# Altium PCB COMM_V2.PcbDoc (part 1 of 2)
Units mm, origin at the board's own origin, x right, y up, seen from the top; angles counter-clockwise.
Board outline 93 x 90 mm, 6 copper layers (Top Layer, Layer 3, Layer 1, Layer 2, Layer 4, Bottom Layer), stack 0.816 mm thick; 305 components, 305 nets, 1414 pads, 23 vias.
Unrouted connection lines stored in the file: 699.
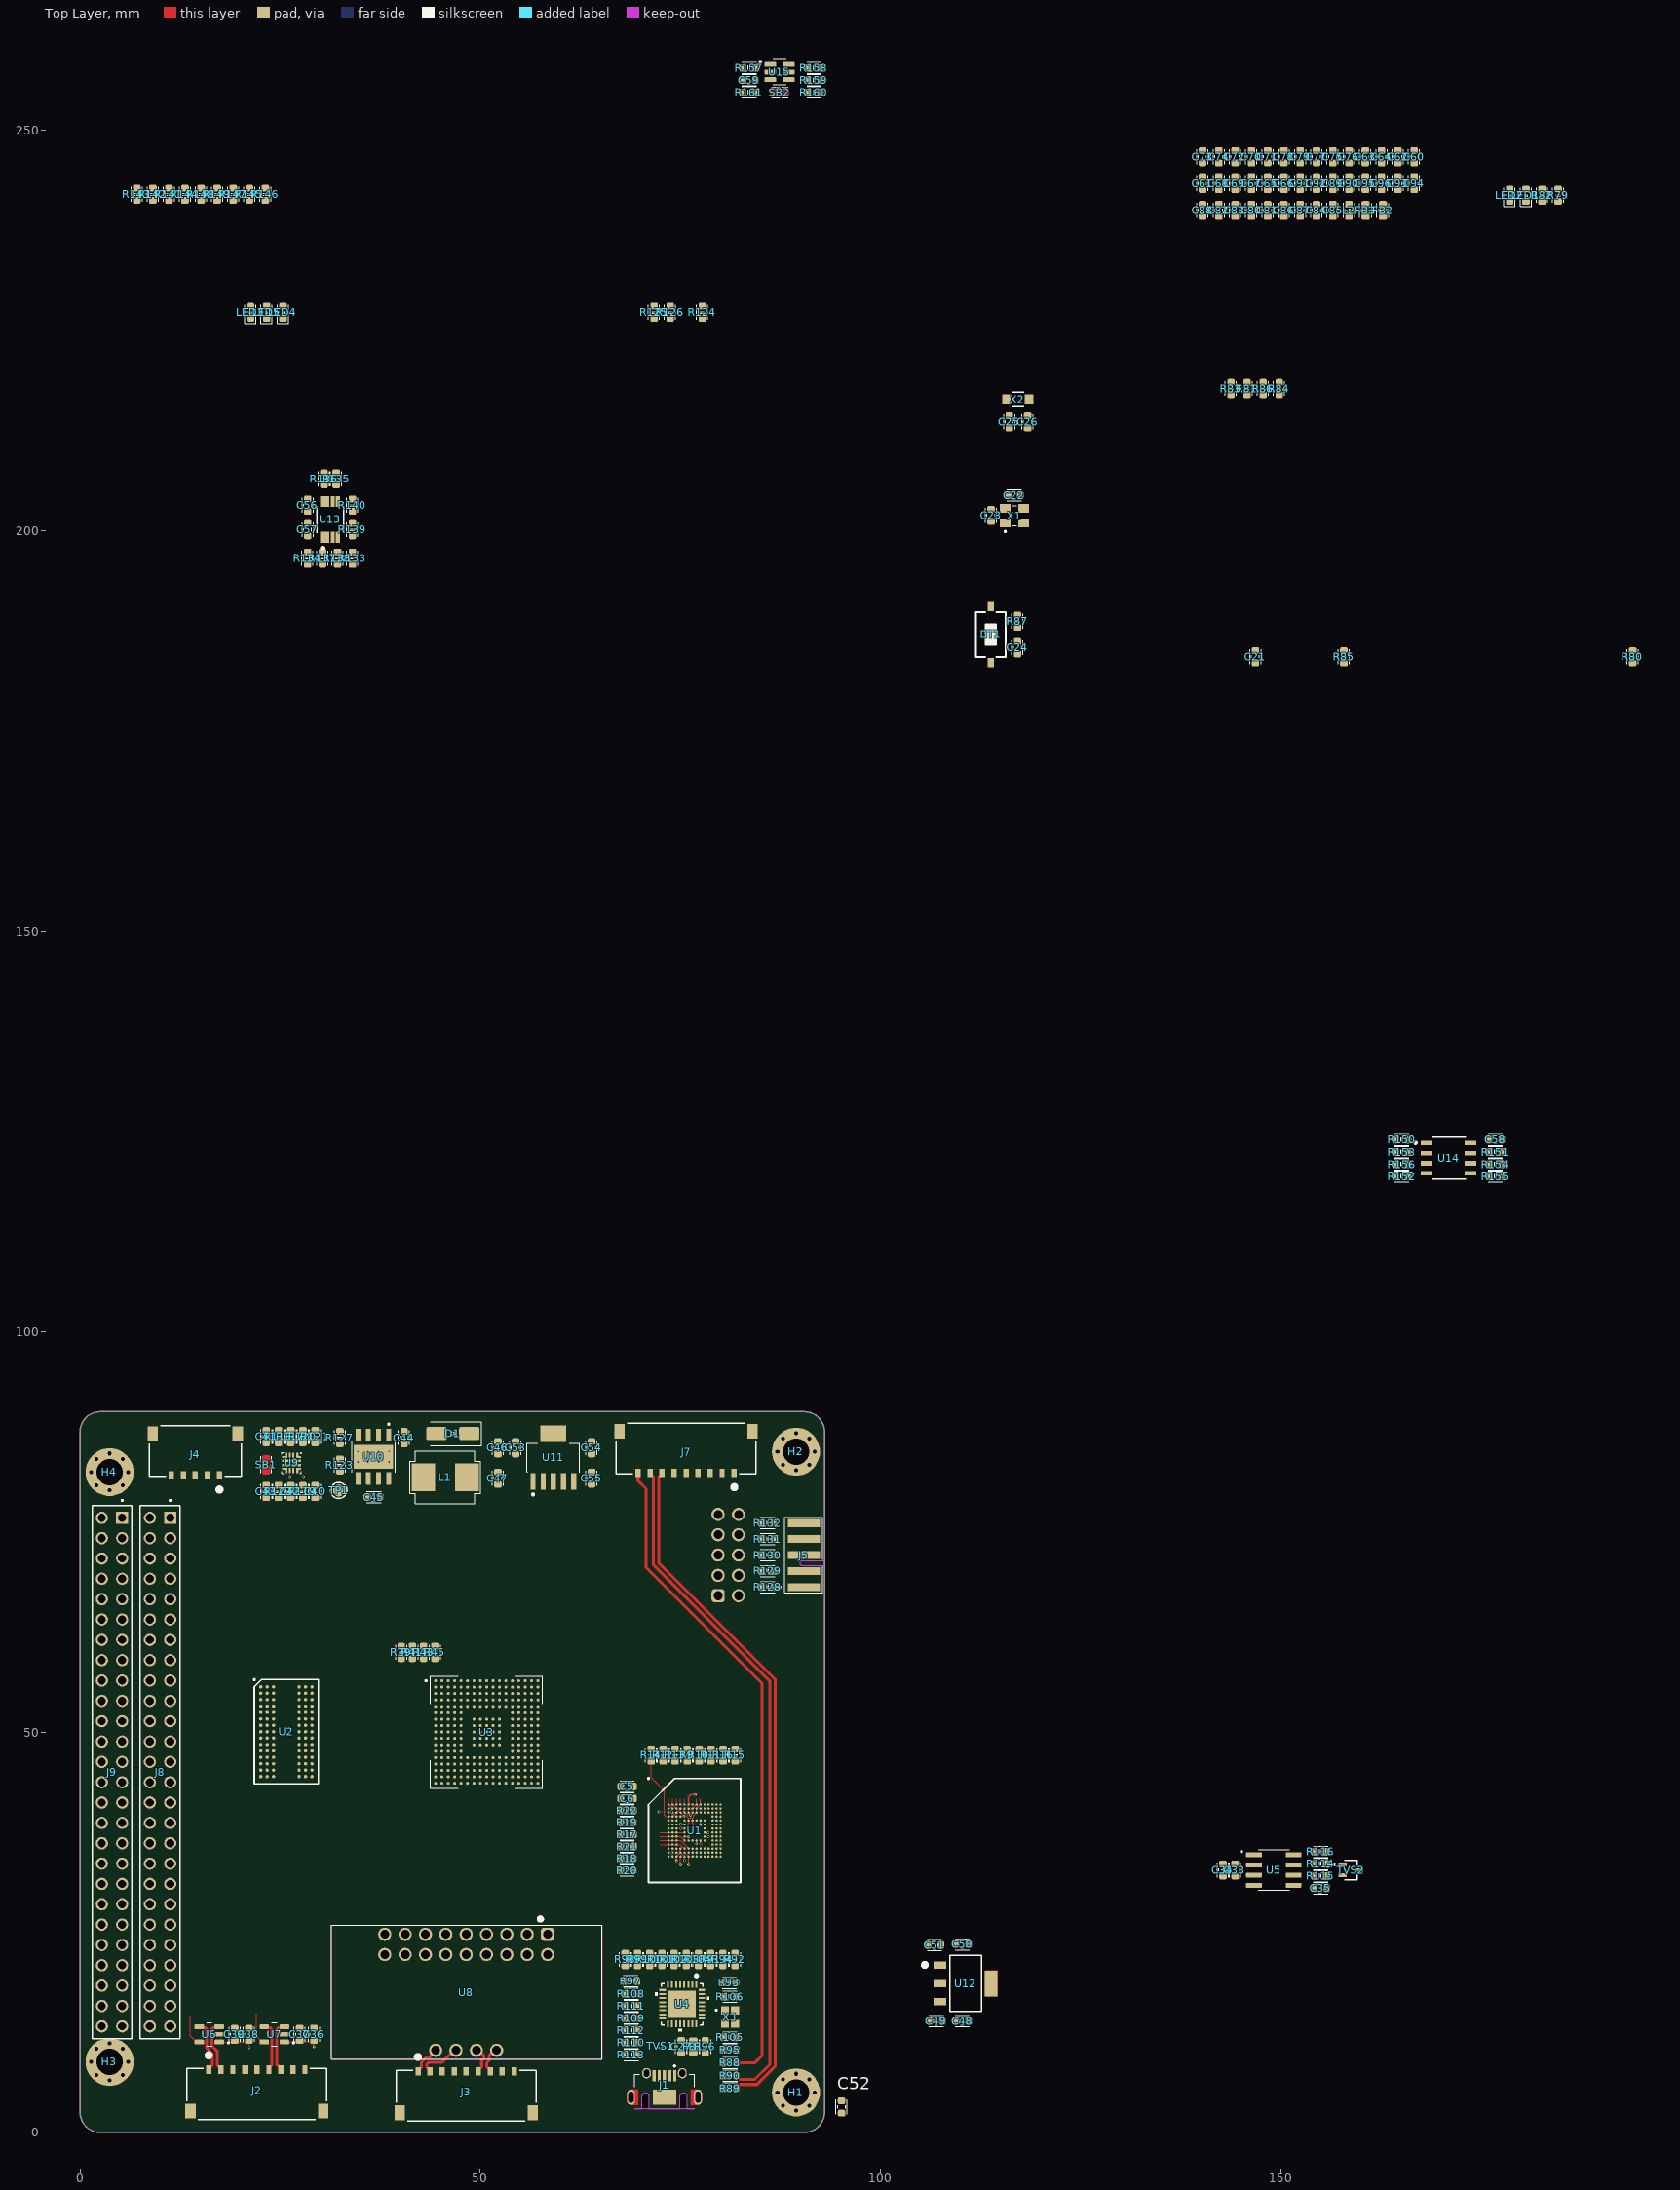
[diagram p0: Top Layer view]
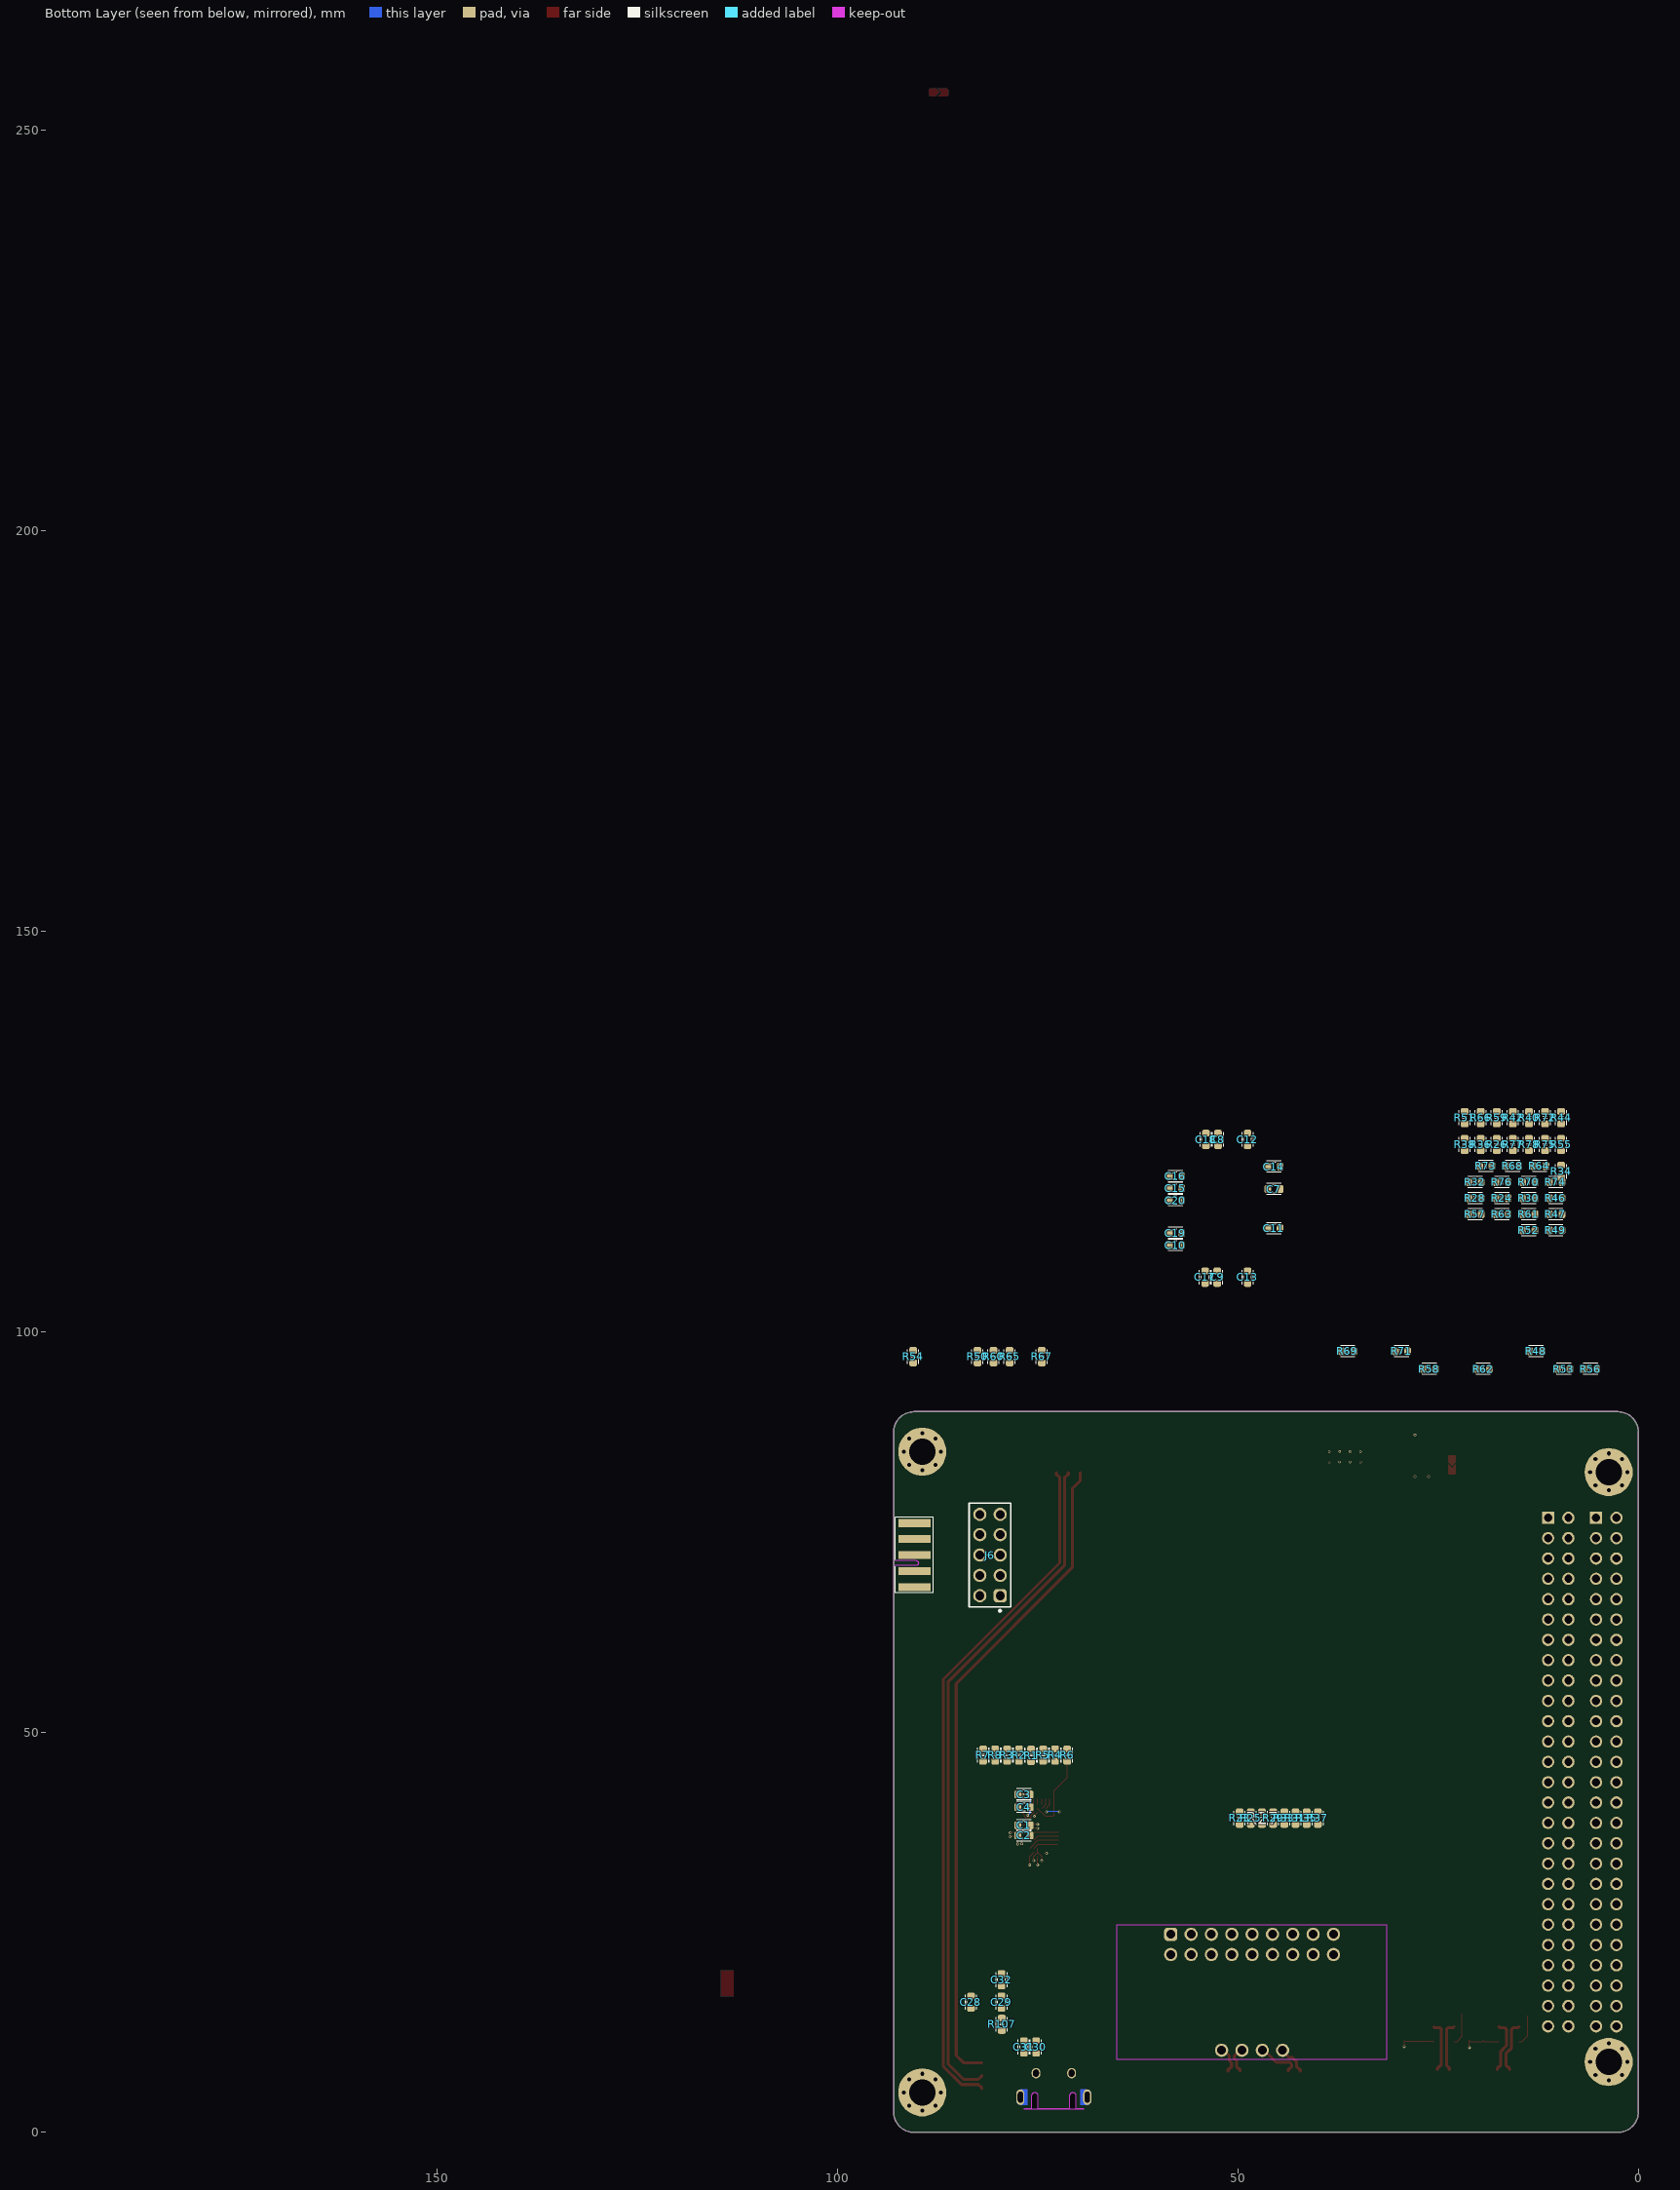
[diagram p1: Bottom Layer view, seen from below]
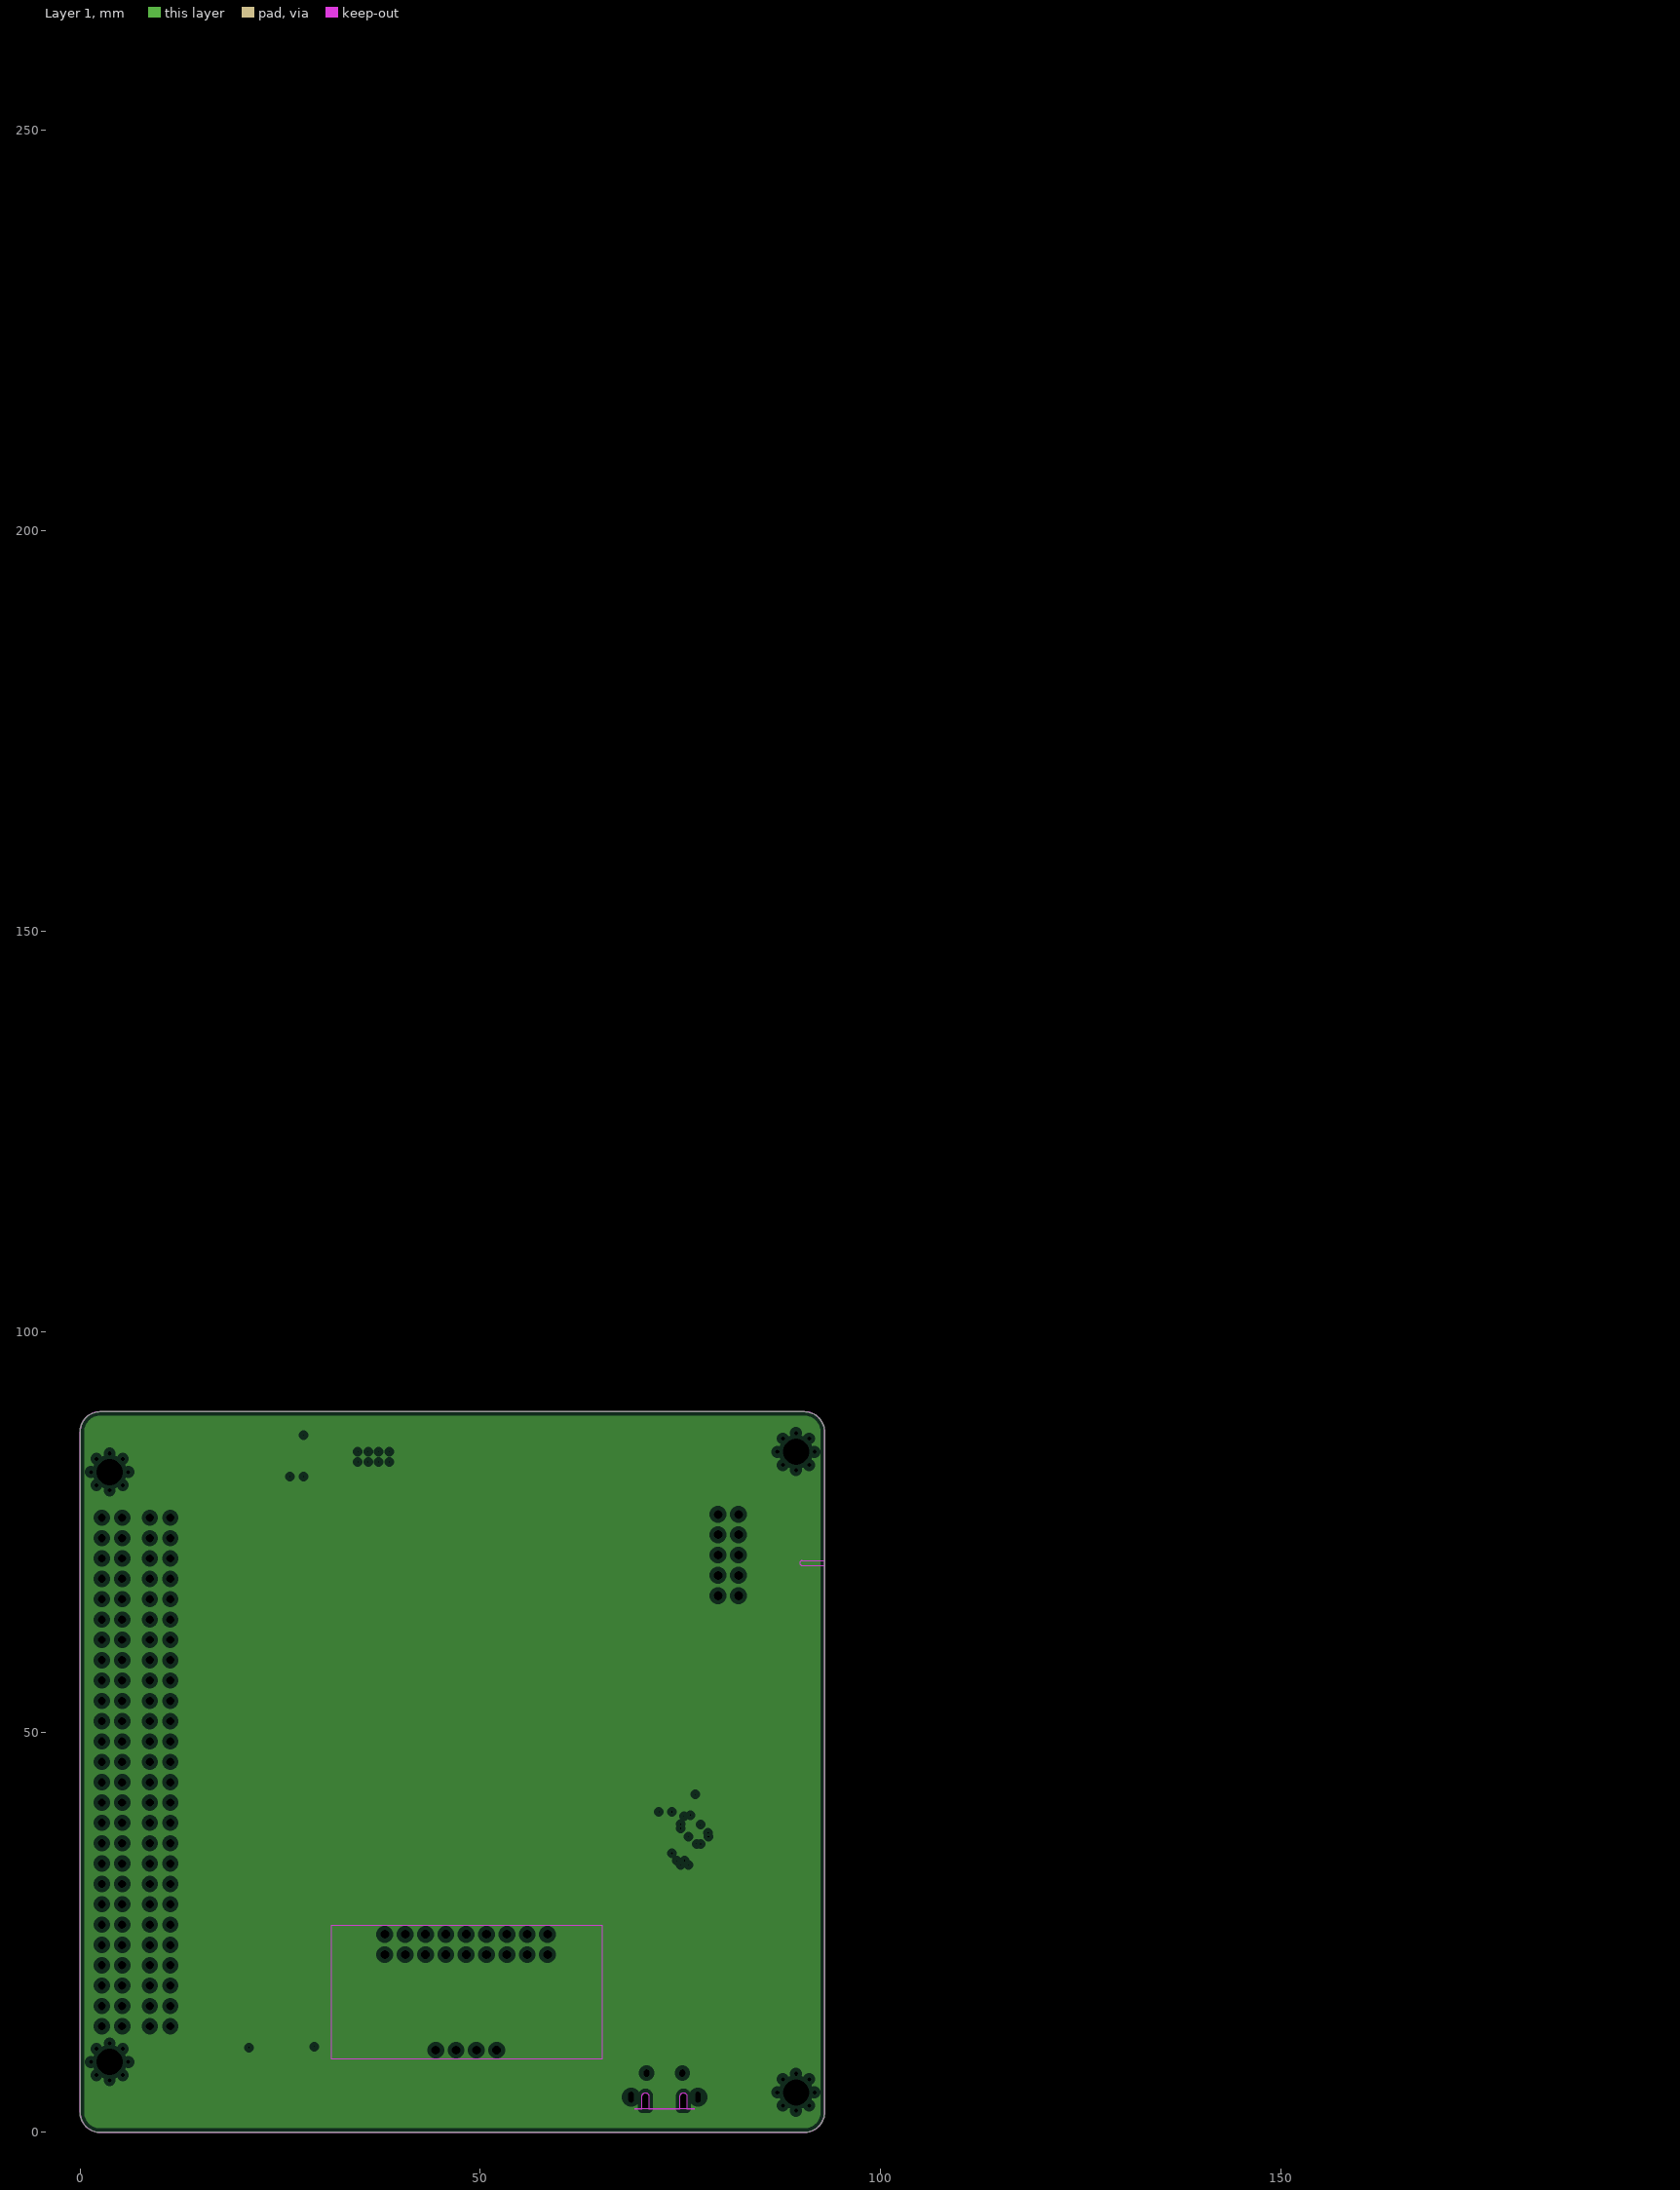
[diagram p2: Layer 1, clearances drawn from the general rule]
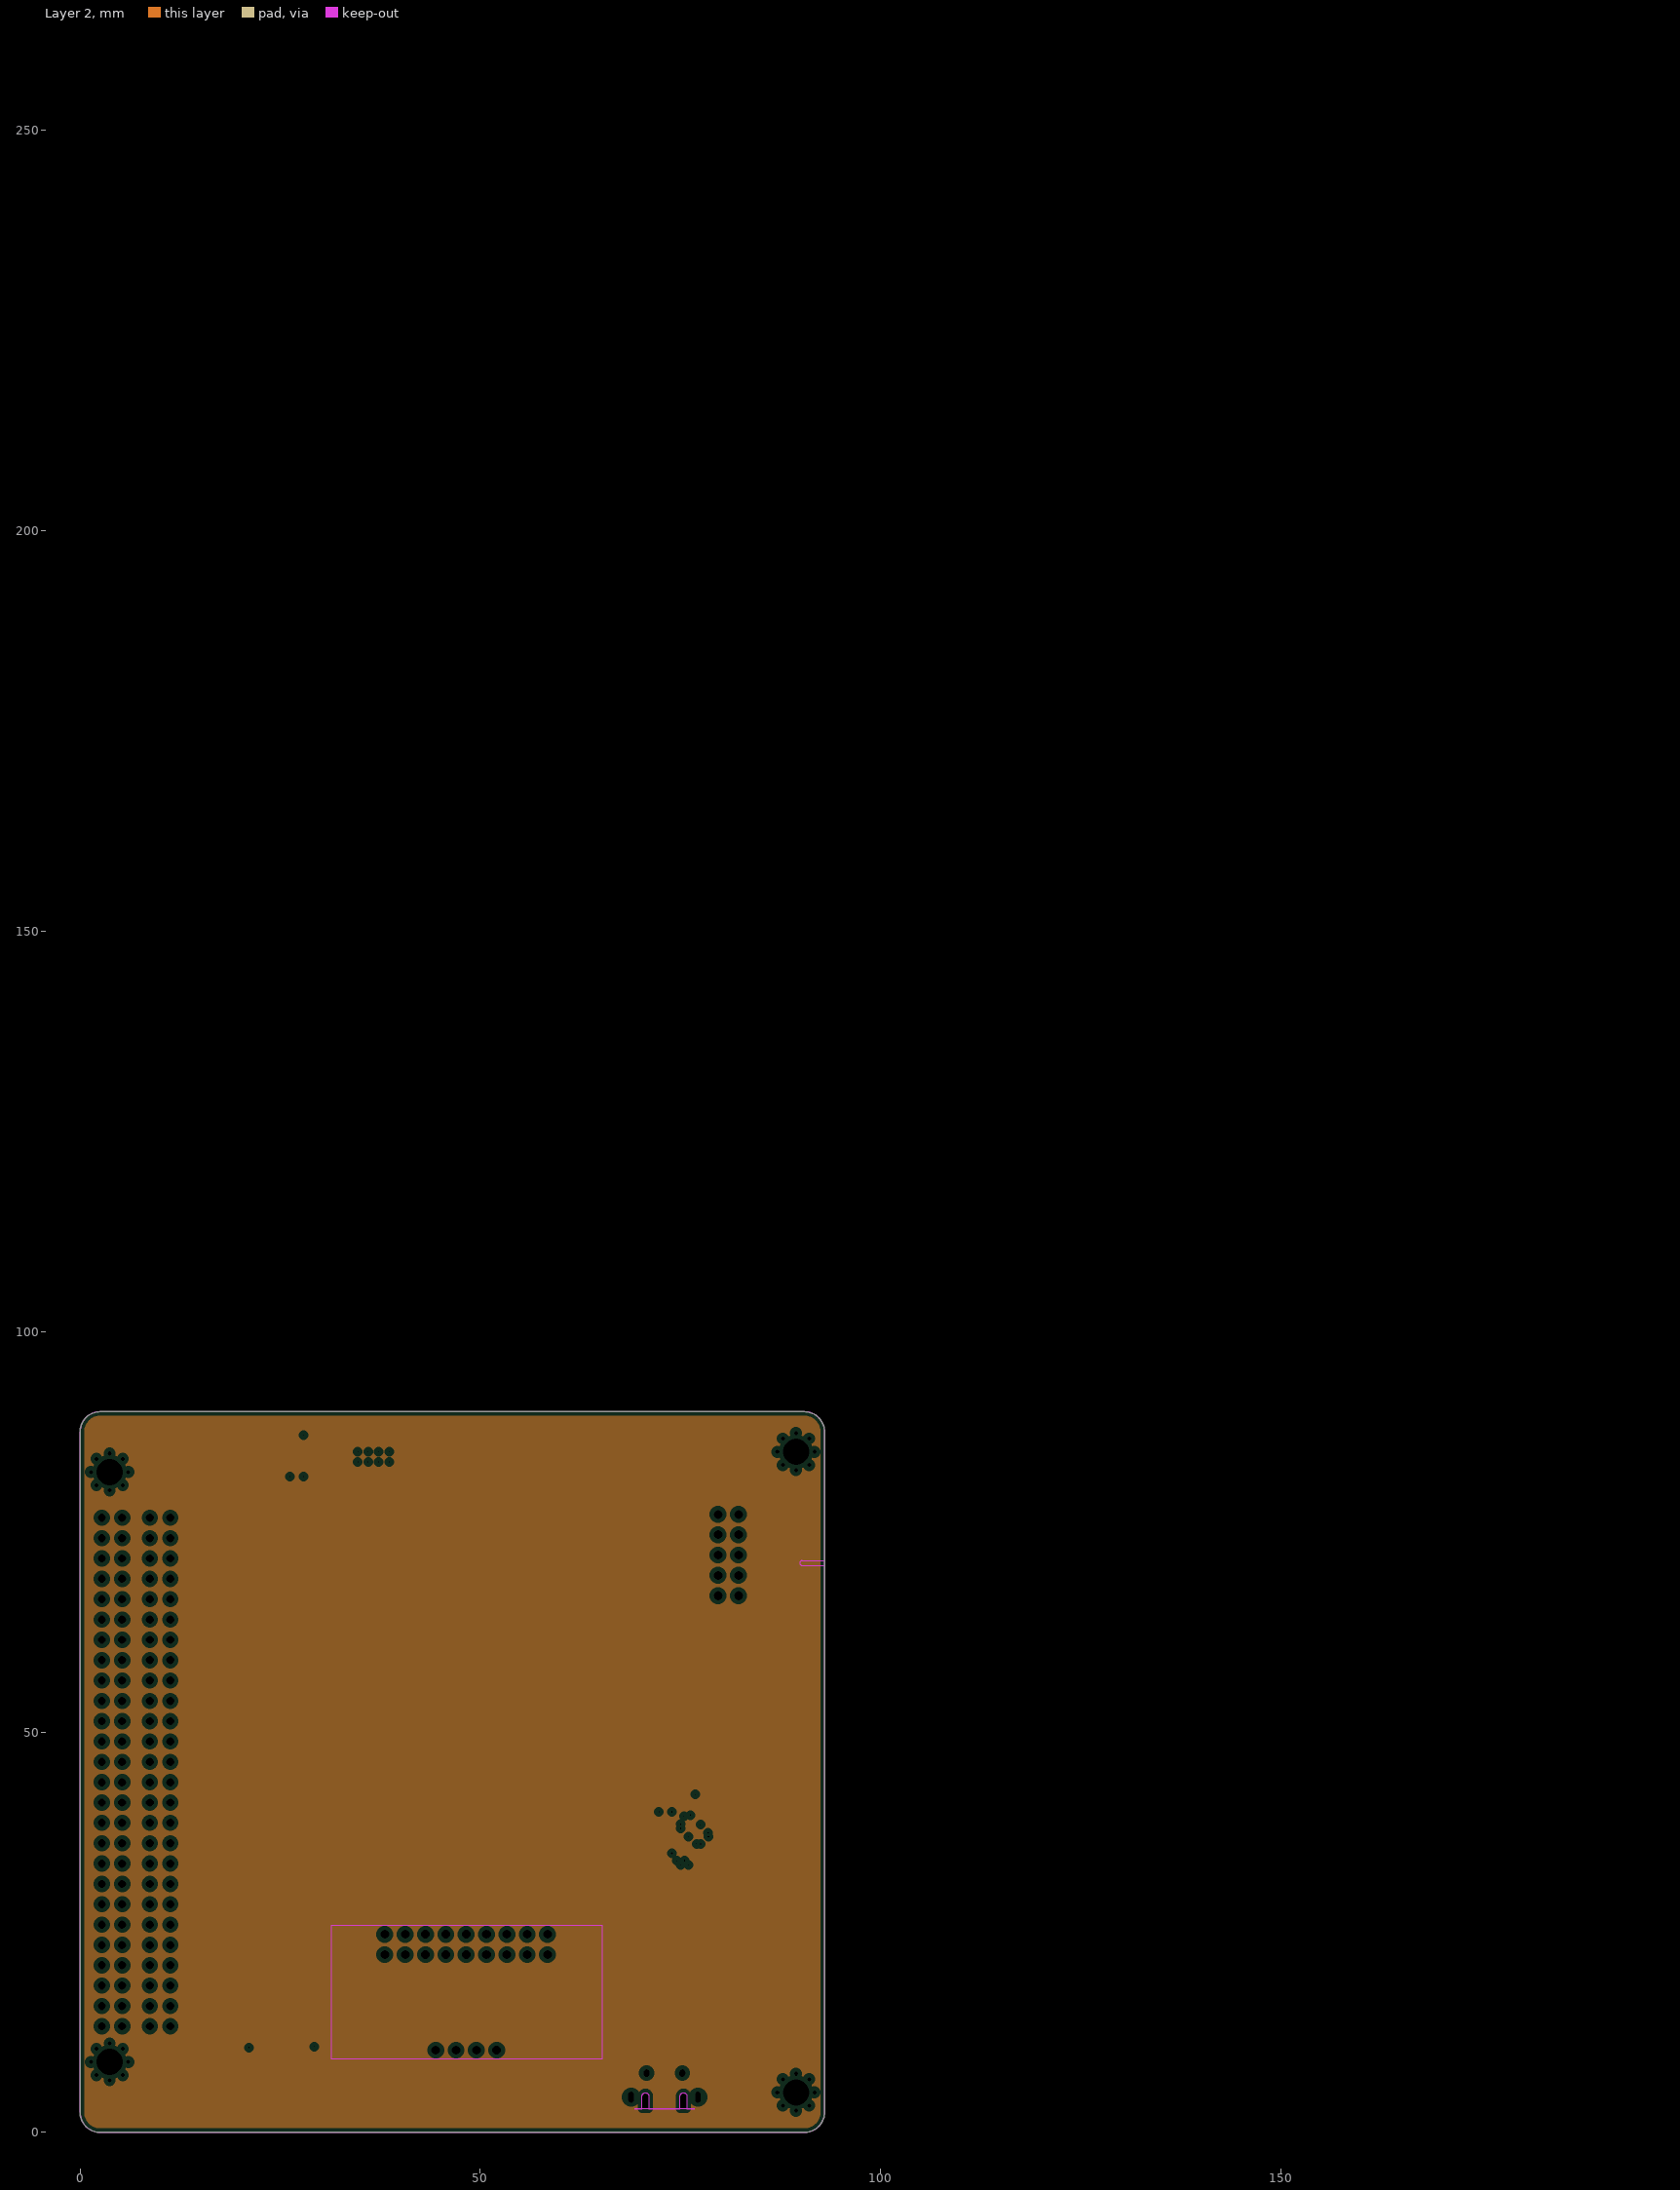
[diagram p3: Layer 2, clearances drawn from the general rule]

## Layer stack, top to bottom
Top Solder: solder mask 0.0102, Solder Resist, Dk 3.5
Top Layer: signal copper 0.0356
Dielectric 4: prepreg 0.0711, PP-006, Dk 4.1
Layer 3: signal copper 0.035
Dielectric 2: prepreg 0.0711, PP-006, Dk 4.1
Layer 1: plane copper 0.035
Dielectric 1: dielectric 0.32, FR-4, Dk 4.8
Layer 2: plane copper 0.035
Dielectric 3: prepreg 0.0711, PP-006, Dk 4.1
Layer 4: signal copper 0.035
Dielectric 5: prepreg 0.0711, PP-006, Dk 4.1
Bottom Layer: signal copper 0.0356
Bottom Solder: solder mask 0.0102, Solder Resist, Dk 3.5

## Board outline
0,2.54 0,87.46 cw(c2.54,87.46) 2.54,90 90.46,90 cw(c90.46,87.46) 93,87.46 93,2.54 cw(c90.46,2.54) 90.46,0 2.54,0 cw(c2.54,2.54)

## Design rules (kind name [scope] priority, off if disabled: settings)
Clearance [All] p1: gap=0.102 ignorepadtopadclearanceinfootprint=FALSE
DiffPairsRouting [All] p1: maxlimit=0.254 minlimit=0.254 mostfreqgap=0.254 toplayer_minwidth=0.381 toplayer_maxwidth=0.381 toplayer_prefwidth=0.381 midlayer1_minwidth=0.381 midlayer1_maxwidth=0.381 midlayer1_prefwidth=0.381 midlayer2_minwidth=0.381 midlayer2_maxwidth=0.381 midlayer2_prefwidth=0.381 bottomlayer_minwidth=0.381 bottomlayer_maxwidth=0.381 bottomlayer_prefwidth=0.381 maxuncoupledlength=12.7
MatchedLengths "Schematic Matched Net Lengths_3" [InNet('SDIO1_CK')] p1: tolerance=2.54 checknetsindiffpair=FALSE checkdiffpairvsdiffpair=TRUE checkxsignals=TRUE checkothers=TRUE
MatchedLengths "Schematic Matched Net Lengths_2" [InNetClass('SDRAM_A[0..11]')] p2: tolerance=2.54 checknetsindiffpair=FALSE checkdiffpairvsdiffpair=TRUE checkxsignals=TRUE checkothers=TRUE
MatchedLengths "Schematic Matched Net Lengths_1" [InNetClass('SDIO1_D[0..7]')] p3: tolerance=2.54 checknetsindiffpair=FALSE checkdiffpairvsdiffpair=TRUE checkxsignals=TRUE checkothers=TRUE
MatchedLengths "Schematic Matched Net Lengths" [InNet('SDIO1_CMD')] p4: tolerance=2.54 checknetsindiffpair=FALSE checkdiffpairvsdiffpair=TRUE checkxsignals=TRUE checkothers=TRUE
PlaneClearance [All] p1: clearance=0.508
PlaneConnect [All] p1: planeconnectstyle=Relief reliefexpansion=0.508 reliefentries=4 reliefconductorwidth=0.254 reliefairgap=0.254
PolygonConnect [All] p1: connectstyle=Relief reliefconductorwidth=0.254 reliefentries=4 polygonreliefangle="90 Angle" airgapwidth=0.254
RoutingVias [All] p1: holewidth=0.2 width=0.35 viastyle="Through Hole" minholewidth=0.2 minwidth=0.35 maxholewidth=0.2 maxwidth=0.35
SolderMaskExpansion [All] p1: expansion=0.102 istentingtop=FALSE
Width [All] p1: maxlimit=0.381 minlimit=0.15 preferedwidth=0.254
27 further rules are at their usual default settings.

## Classes and differential pairs
component class MCU_SDRAM: U2 U3
net class ULPI_D[0..7]: ULPI_D0 ULPI_D1 ULPI_D2 ULPI_D3 ULPI_D4 ULPI_D5 ULPI_D6 ULPI_D7
net class SDRAM_D[0..31]: SDRAM_D0 SDRAM_D1 SDRAM_D2 SDRAM_D3 SDRAM_D4 SDRAM_D5 SDRAM_D6 SDRAM_D7 SDRAM_D8 SDRAM_D9 SDRAM_D10 SDRAM_D11 SDRAM_D12 SDRAM_D13 SDRAM_D14 SDRAM_D15 SDRAM_D16 SDRAM_D17 SDRAM_D18 SDRAM_D19 SDRAM_D20 SDRAM_D21 SDRAM_D22 SDRAM_D23 SDRAM_D24 SDRAM_D25 SDRAM_D26 SDRAM_D27 SDRAM_D28 SDRAM_D29 SDRAM_D30 SDRAM_D31
net class SDRAM_A[0..11]: SDRAM_A0 SDRAM_A1 SDRAM_A2 SDRAM_A3 SDRAM_A4 SDRAM_A5 SDRAM_A6 SDRAM_A7 SDRAM_A8 SDRAM_A9 SDRAM_A10 SDRAM_A11
net class SDIO1_D[0..7]: SDIO1_D0 SDIO1_D1 SDIO1_D2 SDIO1_D3 SDIO1_D4 SDIO1_D5 SDIO1_D6 SDIO1_D7
net class N000-2_[0..4]: FPGA_STATUS0 FPGA_STATUS1 FPGA_STATUS2 FPGA_STATUS3 FPGA_STATUS4
net class N000-1_[0..9]: FPGA_D0 FPGA_D1 FPGA_D2 FPGA_D3 FPGA_D4 FPGA_D5 FPGA_D6 FPGA_D7 FPGA_D8 FPGA_D9
component class WATCHDOG: C59 R157 R158 R159 R160 R161 SB2 U15
component class USB_HS_DEVICE: C27 C28 C29 C30 C31 C32 FB1 J1 R88 R89 R90 R91 R92 R93 R94 R95 R96 R97 R98 R99 R100 R101 R102 R103 R104 R105 R106 R107 R108 R109 R110 R111 R112 R113 TVS1 U4 X3
component class SDRAM: C7 C8 C9 C10 C11 C12 C13 C14 C15 C16 C17 C18 C19 C20 R23 R24 R25 R26 R27 R28 R29 R30 R31 R32 R33 R34 R35 R36 R37 R38 R39 R40 R41 R42 R43 R44 R45 R46 R47 R48 R49 R50 R51 R52 R53 R54 R55 R56 R57 R58 R59 R60 R61 R62 R63 R64 R65 R66 R67 R68 R69 R70 R71 R72 R73 R74 R75 R76 R77 R78 U2
component class POWER: C40 C41 C42 C43 C44 C45 C46 C47 C48 C49 C50 C51 C52 C53 C54 C55 D1 J4 L1 LED3 LED4 LED5 R117 R118 R119 R120 R121 R122 R123 R124 R125 R126 R127 SB1 TP1 U9 U10 U11 U12
component class MODULE_FPGA: J3 U8
component class MCU: BT1 C21 C22 C23 C24 C25 C26 LED1 LED2 R79 R80 R81 R82 R83 R84 R85 R86 R87 U3 X1 X2
component class MCU_POWER: C60 C61 C62 C63 C64 C65 C66 C67 C68 C69 C70 C71 C72 C73 C74 C75 C76 C77 C78 C79 C80 C81 C82 C83 C84 C85 C86 C87 C88 C89 C90 C91 C92 C93 C94 C95 C96 FB2 FB3 L2
component class LVDS: C36 C37 C38 C39 J2 U6 U7
component class I2C: C56 C57 R133 R134 R135 R136 R137 R138 R139 R140 U13
component class FRAM: C58 R150 R151 R152 R153 R154 R155 R156 U14
component class eMMC: C1 C2 C3 C4 C5 C6 R1 R2 R3 R4 R5 R6 R7 R8 R9 R10 R11 R12 R13 R14 R15 R16 R17 R18 R19 R20 R21 R22 U1
component class DEBUG: J5 J6 R128 R129 R130 R131 R132
component class CONNECTOR: H1 H2 H3 H4 J7 J8 J9 R141 R142 R143 R144 R145 R146 R147 R148 R149
component class CAN: C33 C34 C35 R114 R115 R116 TVS2 U5
differential pair USB_HS: +USB_HS_P -USB_HS_N
differential pair USB_CON: +USB_CON_P -USB_CON_N
differential pair LVDS_TxD: +LVDS_TxD_P -LVDS_TxD_N
differential pair LVDS_TxC: +LVDS_TxC_P -LVDS_TxC_N
differential pair FPGA_TxD: +FPGA_TxD_P -FPGA_TxD_N
differential pair FPGA_TxC: +FPGA_TxC_P -FPGA_TxC_N

## Components (designator, comment, footprint, x,y, rotation, side; value= is the part's Value field where it differs from the comment)
BT1 "BT_NRST" SW2-SMD 113.741,187.06 r90 top value="SW chip 2 pin"
C1 "" CAP_C_1608X80 76.736,38.336 r180 bottom value=33pF
C2 "" CAP_C_1608X80 76.736,37.07 r0 bottom value=33pF
C3 "" CAP_C_1608X80 76.733,42.21 r180 bottom value=33pF
C4 "" CAP_C_1608X80 76.733,40.61 r180 bottom value=33pF
C5 "" CAP_C_1608X80 68.333,43.21 r0 top value=33pF
C6 "" CAP_C_1608X80 68.333,41.71 r0 top value=33pF
C7 "0.1uF/16V" CAP_C_1608X80 45.5,117.8 r0 bottom value=33pF
C8 "0.1uF/16V" CAP_C_1608X80 52.5,124 r270 bottom value=33pF
C9 "0.1uF/16V" CAP_C_1608X80 52.6,106.8 r90 bottom value=33pF
C10 "0.1uF/16V" CAP_C_1608X80 57.8,110.8 r180 bottom value=33pF
C11 "0.1uF/16V" CAP_C_1608X80 45.5,112.9 r0 bottom value=33pF
C12 "0.1uF/16V" CAP_C_1608X80 48.8,124 r270 bottom value=33pF
C13 "0.1uF/16V" CAP_C_1608X80 48.8,106.8 r90 bottom value=33pF
C14 "0.1uF/16V" CAP_C_1608X80 45.5,120.6 r0 bottom value=33pF
C15 "0.1uF/16V" CAP_C_1608X80 57.8,117.9 r180 bottom value=33pF
C16 "0.1uF/16V" CAP_C_1608X80 57.8,119.4 r180 bottom value=33pF
C17 "0.1uF/16V" CAP_C_1608X80 54.1,106.8 r90 bottom value=33pF
C18 "0.1uF/16V" CAP_C_1608X80 54,124 r270 bottom value=33pF
C19 "0.1uF/16V" CAP_C_1608X80 57.8,112.3 r180 bottom value=33pF
C20 "0.1uF/16V" CAP_C_1608X80 57.8,116.4 r180 bottom value=33pF
C21 "10nF/16V" CAP_C_1608X80 146.812,184.277 r90 top value=33pF
C22 "12pF/10V" CAP_C_1608X80 116.673,204.461 r0 top value=33pF
C23 "12pF/10V" CAP_C_1608X80 113.792,201.93 r270 top value=33pF
C24 "0.1uF/16V" CAP_C_1608X80 117.094,185.42 r90 top value=33pF
C25 "1.5pF/50V" CAP_C_1608X80 116.078,213.614 r90 top value=33pF
C26 "1.5pF/50V" CAP_C_1608X80 118.364,213.614 r90 top value=33pF
C27 "0.1uF/16V" CAP_C_1608X80 75.1,10.7 r90 top value=33pF
C28 "0.1uF/16V" CAP_C_1608X80 83.342,16.26 r90 bottom value=33pF
C29 "0.1uF/16V" CAP_C_1608X80 79.532,16.26 r270 bottom value=33pF
C30 "0.1uF/16V" CAP_C_1608X80 75.214,10.672 r90 bottom value=33pF
C31 "2.2uF/10V" CAP_C_1608X80 76.738,10.672 r90 bottom value=33pF
C32 "0.1uF/16V" CAP_C_1608X80 79.532,19.054 r270 bottom value=33pF
C33 "1uF/16V" CAP_C_1608X80 144.272,32.766 r90 top value=33pF
C34 "0.1uF/16V" CAP_C_1608X80 142.748,32.766 r90 top value=33pF
C35 "4.7nF/16V" CAP_C_1608X80 154.94,30.48 r180 top value=33pF
C36 "10uF/16V" CAP_C_1608X80 29.231,12.246 r270 top value=33pF
C37 "1uF/16V" CAP_C_1608X80 27.453,12.246 r270 top value=33pF
C38 "10uF/16V" CAP_C_1608X80 21.103,12.246 r270 top value=33pF
C39 "1uF/16V" CAP_C_1608X80 19.325,12.246 r270 top value=33pF
C40 "10uF/16V" CAP_C_1608X80 29.37,80.034 r270 top value=33pF
C41 "10uF/16V" CAP_C_1608X80 23.274,86.892 r90 top value=33pF
C42 "2.2nF/25V" CAP_C_1608X80 26.322,80.034 r90 top
C43 "2.2nF/25V" CAP_C_1608X80 23.274,80.034 r90 top
C44 "0.01uF/16V" CAP_C_1608X80 40.48,86.768 r90 top value=33pF
C45 "2.2uF/16V" CAP_C_1608X80 36.7,79.334 r0 top value=33pF
C46 "10uF/16V" CAP_C_1608X80 52.2,85.5 r270 top value=33pF
C47 "2.2uF/16V" CAP_C_1608X80 52.2,81.7 r270 top value=33pF
C48 "10uF/16V" CAP_C_1608X80 110.2,13.9 r180 top value=33pF
C49 "2.2uF/16V" CAP_C_1608X80 106.933,13.9 r180 top value=33pF
C50 "2.2uF/16V" CAP_C_1608X80 110.2,23.5 r180 top value=33pF
C51 "10uF/16V" CAP_C_1608X80 106.733,23.4 r180 top value=33pF
C52 "2.2uF/16V" CAP_C_1608X80 95.123,3.175 r90 top value=33pF
C53 "10uF/16V" CAP_C_1608X80 54.4,85.5 r270 top value=33pF
C54 "10uF/16V" CAP_C_1608X80 63.9,85.5 r270 top value=33pF
C55 "2.2uF/16V" CAP_C_1608X80 63.9,81.7 r270 top value=33pF
C56 "1uF/16V" CAP_C_1608X80 28.448,203.2 r270 top value=33pF
C57 "0.22uF" CAP_C_1608X80 28.448,200.152 r90 top value=33pF
C58 "0.22uF/16V" CAP_C_1608X80 176.784,123.965 r180 top value=33pF
C59 "0.22uF/16V" CAP_C_1608X80 83.566,256.286 r0 top value=33pF
C60 "0.1uF/16V" CAP_C_1608X80 166.638,246.733 r90 top value=33pF
C61 "0.1uF/16V" CAP_C_1608X80 140.209,243.375 r90 top value=33pF
C62 "0.1uF/16V" CAP_C_1608X80 164.605,246.733 r90 top value=33pF
C63 "0.1uF/16V" CAP_C_1608X80 160.539,246.733 r90 top value=33pF
C64 "0.1uF/16V" CAP_C_1608X80 162.572,246.733 r90 top value=33pF
C65 "0.1uF/16V" CAP_C_1608X80 148.341,243.375 r90 top value=33pF
C66 "0.1uF/16V" CAP_C_1608X80 150.374,243.375 r90 top value=33pF
C67 "0.1uF/16V" CAP_C_1608X80 146.308,243.375 r90 top value=33pF
C68 "0.1uF/16V" CAP_C_1608X80 142.242,243.375 r90 top value=33pF
C69 "0.1uF/16V" CAP_C_1608X80 144.275,243.375 r90 top value=33pF
C70 "4.7uF/16V" CAP_C_1608X80 146.308,246.733 r90 top value=33pF
C71 "0.1uF/16V" CAP_C_1608X80 148.341,246.733 r90 top value=33pF
C72 "0.1uF/16V" CAP_C_1608X80 144.275,246.733 r90 top value=33pF
C73 "0.1uF/16V" CAP_C_1608X80 140.209,246.733 r90 top value=33pF
C74 "0.1uF/16V" CAP_C_1608X80 142.242,246.733 r90 top value=33pF
C75 "0.1uF/16V" CAP_C_1608X80 156.473,246.733 r90 top value=33pF
C76 "0.1uF/16V" CAP_C_1608X80 158.506,246.733 r90 top value=33pF
C77 "0.1uF/16V" CAP_C_1608X80 154.44,246.733 r90 top value=33pF
C78 "0.1uF/16V" CAP_C_1608X80 150.374,246.733 r90 top value=33pF
C79 "0.1uF/16V" CAP_C_1608X80 152.407,246.733 r90 top value=33pF
C80 "0.1uF/16V" CAP_C_1608X80 146.308,240.017 r90 top value=33pF
C81 "220pF/16V" CAP_C_1608X80 148.341,240.017 r90 top value=33pF
C82 "4.7uF/100mR/10V" CAP_C_1608X80 142.242,240.017 r90 top value=33pF
C83 "4.7uF/100mR/10V" CAP_C_1608X80 144.275,240.017 r90 top value=33pF
C84 "10uF/20mR/16V" CAP_C_1608X80 154.44,240.017 r90 top value=33pF
C85 "10uF/20mR/16V" CAP_C_1608X80 156.473,240.017 r90 top value=33pF
C86 "2.2uF/10V" CAP_C_1608X80 150.374,240.017 r90 top value=33pF
C87 "2.2uF/10V" CAP_C_1608X80 152.407,240.017 r90 top value=33pF
C88 "4.7uF/16V" CAP_C_1608X80 140.209,240.017 r90 top value=33pF
C89 "4.7uF/16V" CAP_C_1608X80 156.473,243.375 r90 top value=33pF
C90 "0.1uF/16V" CAP_C_1608X80 158.506,243.375 r90 top value=33pF
C91 "0.1uF/16V" CAP_C_1608X80 152.407,243.375 r90 top value=33pF
C92 "4.7uF/16V" CAP_C_1608X80 154.44,243.375 r90 top value=33pF
C93 "1uF/16V" CAP_C_1608X80 164.605,243.375 r90 top value=33pF
C94 "0.1uF/16V" CAP_C_1608X80 166.638,243.375 r90 top value=33pF
C95 "1uF/16V" CAP_C_1608X80 160.539,243.375 r90 top value=33pF
C96 "0.1uF/16V" CAP_C_1608X80 162.572,243.375 r90 top value=33pF
D1 "SS54" DO-214AC_SMA 46.576,87.276 r180 top value=SS34
FB1 "FB" IND_1608X65 76.6,10.7 r270 top
FB2 "FB" IND_1608X65 162.733,240.017 r90 top
FB3 "FB" IND_1608X65 160.576,240.017 r90 top
H1 "hole_space" HOLE_SPACE 89.43,5 r0 top
H2 "hole_space" HOLE_SPACE 89.43,85 r0 top
H3 "hole_space" HOLE_SPACE 3.7,8.8 r0 top
H4 "hole_space" HOLE_SPACE 3.7,82.46 r0 top
J1 "47590-0001" MOLEX_47590-0001 73,4.4 r0 top
J2 "5040500991" 5040500991 22.1,4.8 r180 top
J3 "5040500991" 5040500991 48.234,4.6 r180 top
J4 "5040500591" CONN_5040500591_MOL 14.4,85.1 r0 top
J5 "009159010061911" 009159010061911 90.4,72.1 r180 top
J6 "61301021121" 61301021121 80.97,72.1 r90 bottom
J7 "5040500991" 5040500991 75.7,85.4 r0 top
J8 "ESQ-126-14-G-D" ESQ-126-14-G-D 10,45 r90 top locked
J9 "ESQ-126-14-G-D" ESQ-126-14-G-D 4,45 r90 top locked
L1 "SRP7050TA-220M" SRP7050TA-220M 45.618,81.815 r0 top
L2 "2.2uH" IND_C_1608X60 158.493,240.017 r90 top
LED1 "LED" LED_0603 180.596,241.907 r90 top value="LED 3 - 5 ly 2 Colour"
LED2 "LED" LED_0603 178.563,241.907 r90 top value="LED 3 - 5 ly 2 Colour"
LED3 "LED" LED_0603 21.289,227.302 r90 top value="LED 3 - 5 ly 2 Colour"
LED4 "LED" LED_0603 25.355,227.302 r90 top value="LED 3 - 5 ly 2 Colour"
LED5 "LED" LED_0603 23.322,227.302 r90 top value="LED 3 - 5 ly 2 Colour"
R1 "" RES_C_1608X60 75.833,47.085 r270 bottom
R2 "" RES_C_1608X60 77.333,47.11 r270 bottom
R3 "" RES_C_1608X60 78.833,47.11 r270 bottom
R4 "" RES_C_1608X60 72.833,47.11 r270 bottom
R5 "" RES_C_1608X60 74.333,47.11 r270 bottom
R6 "" RES_C_1608X60 71.333,47.11 r270 bottom
R7 "" RES_C_1608X60 81.833,47.11 r270 bottom
R8 "" RES_C_1608X60 80.333,47.11 r270 bottom
R9 "" RES_C_1608X60 75.833,47.11 r270 top
R10 "" RES_C_1608X60 77.333,47.11 r270 top
R11 "" RES_C_1608X60 78.833,47.11 r270 top
R12 "" RES_C_1608X60 72.833,47.11 r270 top
R13 "" RES_C_1608X60 74.333,47.11 r270 top
R14 "" RES_C_1608X60 71.333,47.11 r270 top
R15 "" RES_C_1608X60 81.833,47.11 r270 top
R16 "" RES_C_1608X60 80.333,47.11 r270 top
R17 "" RES_C_1608X60 68.333,37.21 r180 top
R18 "" RES_C_1608X60 68.333,34.21 r0 top
R19 "" RES_C_1608X60 68.333,38.71 r180 top
R20 "" RES_C_1608X60 68.333,32.71 r0 top
R21 "" RES_C_1608X60 68.333,35.71 r0 top
R22 "" RES_C_1608X60 68.333,40.21 r0 top
R23 "22R" RES_C_1608X60 49.797,39.243 r270 bottom
R24 "22R" RES_C_1608X60 17.031,116.661 r0 bottom
R25 "22R" RES_C_1608X60 48.4,39.243 r270 bottom
R26 "22R" RES_C_1608X60 17.672,123.36 r90 bottom
R27 "22R" RES_C_1608X60 47.003,39.243 r270 bottom
R28 "22R" RES_C_1608X60 20.389,116.661 r0 bottom
R29 "22R" RES_C_1608X60 45.606,39.243 r270 bottom
R30 "22R" RES_C_1608X60 13.673,116.661 r0 bottom
R31 "22R" RES_C_1608X60 42.812,39.243 r270 bottom
R32 "22R" RES_C_1608X60 20.389,118.669 r0 bottom
R33 "22R" RES_C_1608X60 44.209,39.243 r270 bottom
R34 "22R" RES_C_1608X60 9.64,120.002 r90 bottom
R35 "22R" RES_C_1608X60 41.415,39.243 r270 bottom
R36 "22R" RES_C_1608X60 19.68,123.36 r90 bottom
R37 "22R" RES_C_1608X60 40.018,39.243 r270 bottom
R38 "22R" RES_C_1608X60 21.688,123.36 r90 bottom
R39 "22R" RES_C_1608X60 40.132,59.944 r270 top
R40 "22R" RES_C_1608X60 13.656,126.718 r90 bottom
R41 "22R" RES_C_1608X60 41.529,59.944 r270 top
R42 "22R" RES_C_1608X60 15.664,126.718 r90 bottom
R43 "22R" RES_C_1608X60 42.926,59.944 r270 top
R44 "22R" RES_C_1608X60 9.64,126.718 r90 bottom
R45 "22R" RES_C_1608X60 44.323,59.944 r270 top
R46 "22R" RES_C_1608X60 10.315,116.661 r180 bottom
R47 "22R" RES_C_1608X60 10.315,114.653 r180 bottom
R48 "22R" RES_C_1608X60 12.79,97.548 r0 bottom
R49 "22R" RES_C_1608X60 10.315,112.645 r180 bottom
R50 "22R" RES_C_1608X60 82.531,96.873 r90 bottom
R51 "22R" RES_C_1608X60 21.688,126.718 r90 bottom
R52 "22R" RES_C_1608X60 13.673,112.645 r180 bottom
R53 "22R" RES_C_1608X60 9.303,95.333 r0 bottom
R54 "22R" RES_C_1608X60 90.563,96.873 r90 bottom
R55 "22R" RES_C_1608X60 9.64,123.36 r270 bottom
R56 "22R" RES_C_1608X60 5.945,95.333 r0 bottom
R57 "22R" RES_C_1608X60 20.389,114.653 r0 bottom
R58 "22R" RES_C_1608X60 26.093,95.333 r0 bottom
R59 "22R" RES_C_1608X60 17.672,126.718 r270 bottom
R60 "22R" RES_C_1608X60 80.523,96.873 r90 bottom
R61 "22R" RES_C_1608X60 13.673,114.653 r0 bottom
R62 "22R" RES_C_1608X60 19.377,95.333 r180 bottom
R63 "22R" RES_C_1608X60 17.031,114.653 r0 bottom
R64 "22R" RES_C_1608X60 12.323,120.677 r0 bottom
R65 "22R" RES_C_1608X60 78.515,96.873 r270 bottom
R66 "22R" RES_C_1608X60 19.68,126.718 r270 bottom
R67 "22R" RES_C_1608X60 74.499,96.873 r270 bottom
R68 "22R" RES_C_1608X60 15.681,120.677 r0 bottom
R69 "22R" RES_C_1608X60 36.296,97.548 r180 bottom
R70 "22R" RES_C_1608X60 13.673,118.669 r180 bottom
R71 "22R" RES_C_1608X60 29.58,97.548 r0 bottom
R72 "22R" RES_C_1608X60 11.648,126.718 r270 bottom
R73 "22R" RES_C_1608X60 19.039,120.677 r180 bottom
R74 "22R" RES_C_1608X60 10.315,118.669 r180 bottom
R75 "22R" RES_C_1608X60 11.648,123.36 r270 bottom
R76 "22R" RES_C_1608X60 17.031,118.669 r180 bottom
R77 "22R" RES_C_1608X60 15.664,123.36 r270 bottom
R78 "22R" RES_C_1608X60 13.656,123.36 r270 bottom
R79 "1k" RES_C_1608X60 184.624,241.907 r90 top
R80 "22R" RES_C_1608X60 193.929,184.277 r90 top
R81 "10k (DNP)" RES_C_1608X60 145.76,217.777 r90 top
R82 "1k" RES_C_1608X60 182.616,241.907 r90 top
R83 "10k" RES_C_1608X60 143.752,217.777 r90 top
R84 "10k" RES_C_1608X60 149.776,217.777 r90 top
R85 "22R" RES_C_1608X60 157.861,184.277 r90 top
R86 "10k (DNP)" RES_C_1608X60 147.768,217.777 r90 top
R87 "10k" RES_C_1608X60 117.094,188.722 r270 top
R88 "0R" RES_C_1608X60 81.2,8.7 r0 top
R89 "0R" RES_C_1608X60 81.2,5.5 r0 top
R90 "0R" RES_C_1608X60 81.2,7.1 r0 top
R91 "0R" RES_C_1608X60 78.77,21.594 r90 top
R92 "0R" RES_C_1608X60 81.818,21.594 r90 top
R93 "0R" RES_C_1608X60 81.1,18.7 r0 top
R94 "0R" RES_C_1608X60 80.294,21.594 r90 top
R95 "8.06k 1%" RES_C_1608X60 81.2,10.3 r0 top
R96 "10k 1%" RES_C_1608X60 78.1,10.7 r270 top
R97 "0R" RES_C_1608X60 68.8,18.9 r180 top
R98 "0R" RES_C_1608X60 68.102,21.594 r90 top
R99 "0R" RES_C_1608X60 69.626,21.594 r90 top
R100 "0R" RES_C_1608X60 71.15,21.594 r90 top
R101 "0R" RES_C_1608X60 72.674,21.594 r90 top
R102 "0R" RES_C_1608X60 74.198,21.594 r90 top
R103 "0R" RES_C_1608X60 75.722,21.594 r90 top
R104 "0R" RES_C_1608X60 77.246,21.594 r90 top
R105 "100R" RES_C_1608X60 81.18,11.866 r0 top
R106 "10k" RES_C_1608X60 81.18,16.946 r0 top
R107 "4.7k" RES_C_1608X60 79.5,13.5 r90 bottom
R108 "0R" RES_C_1608X60 68.84,17.308 r0 top
R109 "0R" RES_C_1608X60 68.84,14.26 r0 top
R110 "0R" RES_C_1608X60 68.84,11.212 r0 top
R111 "0R (DNP)" RES_C_1608X60 68.84,15.784 r180 top
R112 "0R (DNP)" RES_C_1608X60 68.84,12.736 r180 top
R113 "0R (DNP)" RES_C_1608X60 68.84,9.688 r180 top
R114 "60R" RES_C_1608X60 154.94,33.528 r180 top
R115 "60R" RES_C_1608X60 154.94,32.004 r0 top
R116 "10k" RES_C_1608X60 154.953,35.052 r180 top
R117 "10k" RES_C_1608X60 26.322,86.892 r90 top
R118 "10k" RES_C_1608X60 24.798,86.892 r90 top
R119 "470k" RES_C_1608X60 27.846,80.034 r90 top
R120 "11k" RES_C_1608X60 27.846,86.892 r270 top
R121 "47k" RES_C_1608X60 29.37,86.892 r90 top
R122 "1k" RES_C_1608X60 24.798,80.034 r270 top
R123 "10k" RES_C_1608X60 32.479,83.339 r90 top
R124 "4.7k" RES_C_1608X60 77.725,227.302 r90 top
R125 "2.2k" RES_C_1608X60 71.701,227.302 r90 top
R126 "1k" RES_C_1608X60 73.709,227.302 r90 top
R127 "3.24k" RES_C_1608X60 32.479,86.768 r90 top
R128 "22R" RES_C_1608X60 85.9,68.1 r0 top
R129 "22R" RES_C_1608X60 85.9,70.1 r0 top
R130 "22R" RES_C_1608X60 85.9,72.1 r0 top
R131 "22R" RES_C_1608X60 85.9,74.1 r180 top
R132 "22R" RES_C_1608X60 85.9,76.1 r180 top
R133 "4.7k" RES_C_1608X60 34.036,196.596 r90 top
R134 "4.7k" RES_C_1608X60 28.435,196.596 r90 top
R135 "4.7k" RES_C_1608X60 32.004,206.502 r270 top
R136 "4.7k" RES_C_1608X60 30.48,206.502 r270 top
R137 "22R" RES_C_1608X60 30.302,196.596 r270 top
R138 "22R" RES_C_1608X60 32.169,196.596 r270 top
R139 "22R" RES_C_1608X60 34.036,200.152 r270 top
R140 "10k" RES_C_1608X60 34.036,203.2 r90 top
R141 "22R" RES_C_1608X60 11.11,242.034 r90 top
R142 "22R" RES_C_1608X60 9.102,242.034 r90 top
R143 "0R" RES_C_1608X60 7.094,242.034 r90 top
R144 "22R" RES_C_1608X60 13.118,242.034 r90 top
R145 "0R" RES_C_1608X60 21.15,242.034 r90 top
R146 "0R" RES_C_1608X60 23.158,242.034 r90 top
R147 "0R" RES_C_1608X60 19.142,242.034 r90 top
R148 "0R" RES_C_1608X60 15.126,242.034 r90 top
R149 "0R" RES_C_1608X60 17.134,242.034 r90 top
R150 "4.7k" RES_C_1608X60 165.1,123.952 r180 top
R151 "4.7k" RES_C_1608X60 176.784,122.428 r0 top
R152 "4.7k" RES_C_1608X60 165.1,119.38 r180 top
R153 "22R" RES_C_1608X60 165.1,122.428 r0 top
R154 "22R" RES_C_1608X60 176.784,120.904 r180 top
R155 "22R" RES_C_1608X60 176.784,119.38 r180 top
R156 "22R" RES_C_1608X60 165.1,120.904 r0 top
R157 "22R" RES_C_1608X60 83.566,257.81 r180 top
R158 "22R" RES_C_1608X60 91.694,257.81 r0 top
R159 "22R" RES_C_1608X60 91.694,256.286 r0 top
R160 "16.5K" RES_C_1608X60 91.694,254.762 r180 top
R161 "16.5K" RES_C_1608X60 83.566,254.762 r0 top
SB1 "JUMPER" JUMPER_1608 23.266,83.357 r90 top
SB2 "JUMPER" JUMPER_1608 87.376,254.762 r0 top
TP1 "Test Point" TESTPOINT 32.334,80.164 r0 top value=N/A
TVS1 "USBULC6-2F3" FLIPCHIP4_USBUL_STM 72.5,10.8 r270 top
TVS2 "ESDCAN02-2BWY" SOT323-3L_STM 158.75,32.766 r270 top
U1 "" BGA153C50P14X14_1150X1300X80 76.76,37.699 r0 top
U2 "IS42S32400J-6BL" BGA90C80P9X15_800X1300X120 25.781,50.038 r0 top
U3 "STM32H745XIH6" BGA265C80P17X17_1400X1400X110N 50.8,50 r0 top
U4 "USB3320C-EZK" QFN32_5X5MC_MCH 75.214,16.006 r270 top
U5 "SN65HVD230DR" SOIC127P599X175-8N 149.098,32.766 r0 top
U6 "DS90LV011AQ-Q1" DS90LV011AQ-Q1 16.15,12.246 r180 top
U7 "DS90LV011AQ-Q1" DS90LV011AQ-Q1 24.278,12.246 r180 top
U8 "Module_FPGA_V1" MODULE_FPGA 56.87,17.634 r180 top
U9 "TPS259470ARPWR" VQFN-HR-10 26.449,83.59 r270 top
U10 "TPS5430DDAR" CONV_TPS5430DDAR 36.655,84.37 r270 top
U11 "TPS7A4533DCQR" DCQ0006A-MFG 59.124,84.275 r90 top
U12 "LD1117S18TR" SOT-223_STM 110.6,18.6 r270 top
U13 "PCA9508DP,118" TSSOP8_SOT505-1_NXP 31.242,201.422 r90 top
U14 "IS66WVS4M8BLL-104NLI" SOIC8_150MIL_N_ISI 170.942,121.666 r0 top
U15 "TPL5015DDCR" TPL5010DDCR 87.376,257.302 r0 top
X1 "XT4" XTAL_ECS-250-12-33Q-JES-TR 116.71,201.902 r0 top value=4Mhz
X2 "MU00525-32.768K" XTAL_MU00525_NDK 117.121,216.421 r0 top
X3 "NSC5004A-24M" NSC5004D-25M 81.18,14.406 r0 top

## Footprints (in the part's own frame and the unit in brackets; to place one, negate y for a bottom-side part, rotate by r counter-clockwise, add the part's x,y. Pads: shape width x height; smd on the part's side, far side on the other; paste and mask are expansions set on the pad)
5040500991 [mil]
  rect 26x41 smd: 1(236.22,-119.76) 2(177.17,-119.76) 3(118.11,-119.76) 4(59.06,-119.76) 5(0,-119.76) 6(-59.06,-119.76) 7(-118.11,-119.76) 8(-177.17,-119.76) 9(-236.22,-119.76)
  rect 51x73 smd: 10(-326.97,84.57) 10(326.97,84.57)
  silkscreen extent -344,-200 344,125, body extent -354,-129 357,124, height 79
61301021121 [mm] "Pin Header, pitch 2.54 mm, THT, Vertical, dual row, 10p"
  rrect50% 1.65x1.65 hole 1.1: 1(-5.08,-1.27)
  round 1.65 hole 1.1: 2(-5.08,1.27) 3(-2.54,-1.27) 4(-2.54,1.27) 5(0,-1.27) 6(0,1.27) 7(2.54,-1.27) 8(2.54,1.27) 9(5.08,-1.27) 10(5.08,1.27)
  silkscreen extent -7.08,-2.62 6.5,2.62, body extent -6.35,-2.54 6.35,2.54, height 8.59
009159010061911 [mm]
  rect 4x1 smd: 1(0,4) 2(0,2) 3(0,0) 4(0,-2) 5(0,-4)
  rect 4x1 smd far side: 6(0,4) 7(0,2) 8(0,0) 9(0,-2) 10(0,-4)
  Keep-Out Layer lines w0.076: -2.6,1.3 0.2,1.3 cw(c0.2,1) 0.2,0.7 -2.6,0.7
  silkscreen extent -2.39,-4.7 3.16,4.7
BGA90C80P9X15_800X1300X120 [mm]
  round 0.41 smd: A1(-3.2,5.6) A2(-2.4,5.6) A3(-1.6,5.6) A7(1.6,5.6) A8(2.4,5.6) A9(3.2,5.6) B1(-3.2,4.8) B2(-2.4,4.8) B3(-1.6,4.8) B7(1.6,4.8) B8(2.4,4.8) B9(3.2,4.8) C1(-3.2,4) C2(-2.4,4) C3(-1.6,4) C7(1.6,4) C8(2.4,4) C9(3.2,4) D1(-3.2,3.2) D2(-2.4,3.2) D3(-1.6,3.2) D7(1.6,3.2) D8(2.4,3.2) D9(3.2,3.2) E1(-3.2,2.4) E2(-2.4,2.4) E3(-1.6,2.4) E7(1.6,2.4) E8(2.4,2.4) E9(3.2,2.4) F1(-3.2,1.6) F2(-2.4,1.6) F3(-1.6,1.6) F7(1.6,1.6) F8(2.4,1.6) F9(3.2,1.6) G1(-3.2,0.8) G2(-2.4,0.8) G3(-1.6,0.8) G7(1.6,0.8) G8(2.4,0.8) G9(3.2,0.8) H1(-3.2,0) H2(-2.4,0) H3(-1.6,0) H7(1.6,0) H8(2.4,0) H9(3.2,0) J1(-3.2,-0.8) J2(-2.4,-0.8) J3(-1.6,-0.8) J7(1.6,-0.8) J8(2.4,-0.8) J9(3.2,-0.8) K1(-3.2,-1.6) K2(-2.4,-1.6) K3(-1.6,-1.6) K7(1.6,-1.6) K8(2.4,-1.6) K9(3.2,-1.6) L1(-3.2,-2.4) L2(-2.4,-2.4) L3(-1.6,-2.4) L7(1.6,-2.4) L8(2.4,-2.4) L9(3.2,-2.4) M1(-3.2,-3.2) M2(-2.4,-3.2) M3(-1.6,-3.2) M7(1.6,-3.2) M8(2.4,-3.2) M9(3.2,-3.2) N1(-3.2,-4) N2(-2.4,-4) N3(-1.6,-4) N7(1.6,-4) N8(2.4,-4) N9(3.2,-4) P1(-3.2,-4.8) P2(-2.4,-4.8) P3(-1.6,-4.8) P7(1.6,-4.8) P8(2.4,-4.8) P9(3.2,-4.8) R1(-3.2,-5.6) R2(-2.4,-5.6) R3(-1.6,-5.6) R7(1.6,-5.6) R8(2.4,-5.6) R9(3.2,-5.6)
  silkscreen extent -4.1,-6.5 4,6.6, body extent -4,-6.5 4,6.5, height 1.2
BGA153C50P14X14_1150X1300X80 [mm]
  round 0.29 smd: A1(-3.25,3.25) A2(-2.75,3.25) A3(-2.25,3.25) A4(-1.75,3.25) A5(-1.25,3.25) A6(-0.75,3.25) A7(-0.25,3.25) A8(0.25,3.25) A9(0.75,3.25) A10(1.25,3.25) A11(1.75,3.25) A12(2.25,3.25) A13(2.75,3.25) A14(3.25,3.25) B1(-3.25,2.75) B2(-2.75,2.75) B3(-2.25,2.75) B4(-1.75,2.75) B5(-1.25,2.75) B6(-0.75,2.75) B7(-0.25,2.75) B8(0.25,2.75) B9(0.75,2.75) B10(1.25,2.75) B11(1.75,2.75) B12(2.25,2.75) B13(2.75,2.75) B14(3.25,2.75) C1(-3.25,2.25) C2(-2.75,2.25) C3(-2.25,2.25) C4(-1.75,2.25) C5(-1.25,2.25) C6(-0.75,2.25) C7(-0.25,2.25) C8(0.25,2.25) C9(0.75,2.25) C10(1.25,2.25) C11(1.75,2.25) C12(2.25,2.25) C13(2.75,2.25) C14(3.25,2.25) D1(-3.25,1.75) D2(-2.75,1.75) D3(-2.25,1.75) D4(-1.75,1.75) D12(2.25,1.75) D13(2.75,1.75) D14(3.25,1.75) E1(-3.25,1.25) E2(-2.75,1.25) E3(-2.25,1.25) E5(-1.25,1.25) E6(-0.75,1.25) E7(-0.25,1.25) E8(0.25,1.25) E9(0.75,1.25) E10(1.25,1.25) E12(2.25,1.25) E13(2.75,1.25) E14(3.25,1.25) F1(-3.25,0.75) F2(-2.75,0.75) F3(-2.25,0.75) F5(-1.25,0.75) F10(1.25,0.75) F12(2.25,0.75) F13(2.75,0.75) F14(3.25,0.75) G1(-3.25,0.25) G2(-2.75,0.25) G3(-2.25,0.25) G5(-1.25,0.25) G10(1.25,0.25) G12(2.25,0.25) G13(2.75,0.25) G14(3.25,0.25) H1(-3.25,-0.25) H2(-2.75,-0.25) H3(-2.25,-0.25) H5(-1.25,-0.25) H10(1.25,-0.25) H12(2.25,-0.25) H13(2.75,-0.25) H14(3.25,-0.25) J1(-3.25,-0.75) J2(-2.75,-0.75) J3(-2.25,-0.75) J5(-1.25,-0.75) J10(1.25,-0.75) J12(2.25,-0.75) J13(2.75,-0.75) J14(3.25,-0.75) K1(-3.25,-1.25) K2(-2.75,-1.25) K3(-2.25,-1.25) K5(-1.25,-1.25) K6(-0.75,-1.25) K7(-0.25,-1.25) K8(0.25,-1.25) K9(0.75,-1.25) K10(1.25,-1.25) K12(2.25,-1.25) K13(2.75,-1.25) K14(3.25,-1.25) L1(-3.25,-1.75) L2(-2.75,-1.75) L3(-2.25,-1.75) L12(2.25,-1.75) L13(2.75,-1.75) L14(3.25,-1.75) M1(-3.25,-2.25) M2(-2.75,-2.25) M3(-2.25,-2.25) M4(-1.75,-2.25) M5(-1.25,-2.25) M6(-0.75,-2.25) M7(-0.25,-2.25) M8(0.25,-2.25) M9(0.75,-2.25) M10(1.25,-2.25) M11(1.75,-2.25) M12(2.25,-2.25) M13(2.75,-2.25) M14(3.25,-2.25) N1(-3.25,-2.75) N2(-2.75,-2.75) N3(-2.25,-2.75) N4(-1.75,-2.75) N5(-1.25,-2.75) N6(-0.75,-2.75) N7(-0.25,-2.75) N8(0.25,-2.75) N9(0.75,-2.75) N10(1.25,-2.75) N11(1.75,-2.75) N12(2.25,-2.75) N13(2.75,-2.75) N14(3.25,-2.75) P1(-3.25,-3.25) P2(-2.75,-3.25) P3(-2.25,-3.25) P4(-1.75,-3.25) P5(-1.25,-3.25) P6(-0.75,-3.25) P7(-0.25,-3.25) P8(0.25,-3.25) P9(0.75,-3.25) P10(1.25,-3.25) P11(1.75,-3.25) P12(2.25,-3.25) P13(2.75,-3.25) P14(3.25,-3.25)
  silkscreen extent -5.85,-6.5 5.75,6.6, body extent -5.75,-6.5 5.75,6.5, height 0.8
BGA265C80P17X17_1400X1400X110N [mm]
  round 0.37 smd: A1(-6.4,6.4) A2(-5.6,6.4) A3(-4.8,6.4) A4(-4,6.4) A5(-3.2,6.4) A6(-2.4,6.4) A7(-1.6,6.4) A8(-0.8,6.4) A9(0,6.4) A10(0.8,6.4) A11(1.6,6.4) A12(2.4,6.4) A13(3.2,6.4) A14(4,6.4) A15(4.8,6.4) A16(5.6,6.4) A17(6.4,6.4) B1(-6.4,5.6) B2(-5.6,5.6) B3(-4.8,5.6) B4(-4,5.6) B5(-3.2,5.6) B6(-2.4,5.6) B7(-1.6,5.6) B8(-0.8,5.6) B9(0,5.6) B10(0.8,5.6) B11(1.6,5.6) B12(2.4,5.6) B13(3.2,5.6) B14(4,5.6) B15(4.8,5.6) B16(5.6,5.6) B17(6.4,5.6) C1(-6.4,4.8) C2(-5.6,4.8) C3(-4.8,4.8) C4(-4,4.8) C5(-3.2,4.8) C6(-2.4,4.8) C7(-1.6,4.8) C8(-0.8,4.8) C9(0,4.8) C10(0.8,4.8) C11(1.6,4.8) C12(2.4,4.8) C13(3.2,4.8) C14(4,4.8) C15(4.8,4.8) C16(5.6,4.8) C17(6.4,4.8) D1(-6.4,4) D2(-5.6,4) D3(-4.8,4) D4(-4,4) D5(-3.2,4) D6(-2.4,4) D7(-1.6,4) D8(-0.8,4) D9(0,4) D10(0.8,4) D11(1.6,4) D12(2.4,4) D13(3.2,4) D14(4,4) D15(4.8,4) D16(5.6,4) D17(6.4,4) E1(-6.4,3.2) E2(-5.6,3.2) E3(-4.8,3.2) E4(-4,3.2) E5(-3.2,3.2) E6(-2.4,3.2) E7(-1.6,3.2) E8(-0.8,3.2) E9(0,3.2) E10(0.8,3.2) E11(1.6,3.2) E12(2.4,3.2) E13(3.2,3.2) E14(4,3.2) E15(4.8,3.2) E16(5.6,3.2) E17(6.4,3.2) F1(-6.4,2.4) F2(-5.6,2.4) F3(-4.8,2.4) F4(-4,2.4) F5(-3.2,2.4) F13(3.2,2.4) F14(4,2.4) F15(4.8,2.4) F16(5.6,2.4) F17(6.4,2.4) G1(-6.4,1.6) G2(-5.6,1.6) G3(-4.8,1.6) G4(-4,1.6) G5(-3.2,1.6) G7(-1.6,1.6) G8(-0.8,1.6) G9(0,1.6) G10(0.8,1.6) G11(1.6,1.6) G13(3.2,1.6) G14(4,1.6) G15(4.8,1.6) G16(5.6,1.6) G17(6.4,1.6) H1(-6.4,0.8) H2(-5.6,0.8) H3(-4.8,0.8) H4(-4,0.8) H5(-3.2,0.8) H7(-1.6,0.8) H8(-0.8,0.8) H9(0,0.8) H10(0.8,0.8) H11(1.6,0.8) H13(3.2,0.8) H14(4,0.8) H15(4.8,0.8) H16(5.6,0.8) H17(6.4,0.8) J1(-6.4,0) J2(-5.6,0) J3(-4.8,0) J4(-4,0) J5(-3.2,0) J7(-1.6,0) J8(-0.8,0) J9(0,0) J10(0.8,0) J11(1.6,0) J13(3.2,0) J14(4,0) J15(4.8,0) J16(5.6,0) J17(6.4,0) K1(-6.4,-0.8) K2(-5.6,-0.8) K3(-4.8,-0.8) K4(-4,-0.8) K5(-3.2,-0.8) K7(-1.6,-0.8) K8(-0.8,-0.8) K9(0,-0.8) K10(0.8,-0.8) K11(1.6,-0.8) K13(3.2,-0.8) K14(4,-0.8) K15(4.8,-0.8) K16(5.6,-0.8) K17(6.4,-0.8) L1(-6.4,-1.6) L2(-5.6,-1.6) L3(-4.8,-1.6) L4(-4,-1.6) L5(-3.2,-1.6) L7(-1.6,-1.6) L8(-0.8,-1.6) L9(0,-1.6) L10(0.8,-1.6) L11(1.6,-1.6) L13(3.2,-1.6) L14(4,-1.6) L15(4.8,-1.6) L16(5.6,-1.6) L17(6.4,-1.6) M1(-6.4,-2.4) M2(-5.6,-2.4) M3(-4.8,-2.4) M4(-4,-2.4) M5(-3.2,-2.4) M13(3.2,-2.4) M14(4,-2.4) M15(4.8,-2.4) M16(5.6,-2.4) M17(6.4,-2.4) N1(-6.4,-3.2) N2(-5.6,-3.2) N3(-4.8,-3.2) N4(-4,-3.2) N5(-3.2,-3.2) N6(-2.4,-3.2) N7(-1.6,-3.2) N8(-0.8,-3.2) N9(0,-3.2) N10(0.8,-3.2) N11(1.6,-3.2) N12(2.4,-3.2) N13(3.2,-3.2) N14(4,-3.2) N15(4.8,-3.2) N16(5.6,-3.2) N17(6.4,-3.2) P1(-6.4,-4) P2(-5.6,-4) P3(-4.8,-4) P4(-4,-4) P5(-3.2,-4) P6(-2.4,-4) P7(-1.6,-4) P8(-0.8,-4) P9(0,-4) P10(0.8,-4) P11(1.6,-4) P12(2.4,-4) P13(3.2,-4) P14(4,-4) P15(4.8,-4) P16(5.6,-4) P17(6.4,-4) R1(-6.4,-4.8) R2(-5.6,-4.8) R3(-4.8,-4.8) R4(-4,-4.8) R5(-3.2,-4.8) R6(-2.4,-4.8) R7(-1.6,-4.8) R8(-0.8,-4.8) R9(0,-4.8) R10(0.8,-4.8) R11(1.6,-4.8) R12(2.4,-4.8) R13(3.2,-4.8) R14(4,-4.8) R15(4.8,-4.8) R16(5.6,-4.8) R17(6.4,-4.8) T1(-6.4,-5.6) T2(-5.6,-5.6) T3(-4.8,-5.6) T4(-4,-5.6) T5(-3.2,-5.6) T6(-2.4,-5.6) T7(-1.6,-5.6) T8(-0.8,-5.6) T9(0,-5.6) T10(0.8,-5.6) T11(1.6,-5.6) T12(2.4,-5.6) T13(3.2,-5.6) T14(4,-5.6) T15(4.8,-5.6) T16(5.6,-5.6) T17(6.4,-5.6) U1(-6.4,-6.4) U2(-5.6,-6.4) U3(-4.8,-6.4) U4(-4,-6.4) U5(-3.2,-6.4) U6(-2.4,-6.4) U7(-1.6,-6.4) U8(-0.8,-6.4) U9(0,-6.4) U10(0.8,-6.4) U11(1.6,-6.4) U12(2.4,-6.4) U13(3.2,-6.4) U14(4,-6.4) U15(4.8,-6.4) U16(5.6,-6.4) U17(6.4,-6.4)
  silkscreen extent -7.67,-7 7,7, body extent -7,-7 7,7, height 1.1
CAP_C_1608X80 [mm] "Chip Capacitor, 2-Leads, Body 1.60x0.80mm, IPC Medium Density"
  rrect50% 0.85x0.95 smd: 1(-0.775,0) 2(0.775,0)
  silkscreen extent -0.9,-0.7 0.9,0.7, body extent -0.87,-0.48 0.87,0.48, height 0.85
CONN_5040500591_MOL [mil]
  rect 26x41 smd: 1(118.11,-119.76) 2(59.06,-119.76) 3(0,-119.76) 4(-59.06,-119.76) 5(-118.11,-119.76)
  rect 51x73 smd: 6(-208.86,84.57) 6(208.86,84.57)
  silkscreen extent -226,-200 226,125, body extent -237,-134 237,120, height 79
CONV_TPS5430DDAR [mm] "IC REG BUCK ADJ 3A 8SOPWR"
  rrect10% 1.55x0.6 smd mask+0: 1(-2.7,1.905) 2(-2.7,0.635) 3(-2.7,-0.635) 4(-2.7,-1.905) 5(2.7,-1.905) 6(2.7,-0.635) 7(2.7,0.635) 8(2.7,1.905)
  round 0.3 hole 0.2 mask+0: 6(-0.65,1.95) 6(-0.65,0.65) 6(-0.65,-0.65) 6(-0.65,-1.95) 6(0.65,1.95) 6(0.65,0.65) 6(0.65,-0.65) 6(0.65,-1.95)
  rect 2.95x4.9 smd paste+0: 9(0,0)
  silkscreen extent -4.17,-2.69 1.96,2.72, body extent -3,-2.45 3,2.45, height 1.7
DCQ0006A-MFG [mm]
  rect 2.05x0.65 smd: 1(-3,2.54) 2(-3,1.27) 3(-3,0) 4(-3,-1.27) 5(-3,-2.54)
  rect 2.05x3.2 smd: 6(3,0)
  silkscreen extent -4.72,-3.3 1.8,3.3, body extent -3.55,-3.25 3.55,3.25, height 1.66
DO-214AC_SMA [mm] "Molded Diode, 2-Leads, Body 5.20x2.61mm, IPC Medium Density"
  rrect30% 2.55x1.65 smd: 1(-2.05,0) 2(2.05,0)
  silkscreen extent -3.6,-1.5 2.8,1.5, body extent -2.6,-1.3 2.6,1.3, height 2.4
DS90LV011AQ-Q1 [mm]
  rrect50% 1.21x0.59 smd: 1(-1.255,0.95) 2(-1.255,0) 3(-1.255,-0.95) 4(1.255,-0.95) 5(1.255,0.95)
  silkscreen extent -2.51,-1.45 0.8,1.45, body extent -1.4,-1.45 1.4,1.45, height 1.45
ESQ-126-14-G-D [mm]
  rect 1.53x1.53 / inner round 1.53 / far side rect 1.53x1.53 hole 1.02: 01(31.75,-1.27)
  round 1.53 hole 1.02: 02(31.75,1.27) 03(29.21,-1.27) 04(29.21,1.27) 05(26.67,-1.27) 06(26.67,1.27) 07(24.13,-1.27) 08(24.13,1.27) 09(21.59,-1.27) 10(21.59,1.27) 11(19.05,-1.27) 12(19.05,1.27) 13(16.51,-1.27) 14(16.51,1.27) 15(13.97,-1.27) 16(13.97,1.27) 17(11.43,-1.27) 18(11.43,1.27) 19(8.89,-1.27) 20(8.89,1.27) 21(6.35,-1.27) 22(6.35,1.27) 23(3.81,-1.27) 24(3.81,1.27) 25(1.27,-1.27) 26(1.27,1.27) 27(-1.27,-1.27) 28(-1.27,1.27) 29(-3.81,-1.27) 30(-3.81,1.27) 31(-6.35,-1.27) 32(-6.35,1.27) 33(-8.89,-1.27) 34(-8.89,1.27) 35(-11.43,-1.27) 36(-11.43,1.27) 37(-13.97,-1.27) 38(-13.97,1.27) 39(-16.51,-1.27) 40(-16.51,1.27) 41(-19.05,-1.27) 42(-19.05,1.27) 43(-21.59,-1.27) 44(-21.59,1.27) 45(-24.13,-1.27) 46(-24.13,1.27) 47(-26.67,-1.27) 48(-26.67,1.27) 49(-29.21,-1.27) 50(-29.21,1.27) 51(-31.75,-1.27) 52(-31.75,1.27)
  silkscreen extent -33.28,-2.47 34.02,2.47, body extent -33.27,-2.67 33.27,2.41, height 11.2
FLIPCHIP4_USBUL_STM [mil]
  round 10 smd paste+0 mask+0: A1(-7.87,7.87) A2(7.87,7.88) B1(-7.87,-7.88) B2(7.87,-7.87)
  body extent -16,-16 16,16, height 26
HOLE_SPACE [mm]
  round 1 hole 0.5: 1(-2.325,0) 1(-1.644,-1.644) 1(-1.644,1.644) 1(0,-2.286) 1(0,2.325) 1(1.644,-1.644) 1(1.644,1.644) 1(2.325,0)
  round 6 hole 3.3: 1(0,0)
IND_1608X65 [mm]
  rrect50% 0.95x1.05 smd: 1(-0.71,0) 2(0.71,0)
  silkscreen extent -0.91,-0.76 0.89,0.76, body extent -0.81,-0.48 0.79,0.47, height 0.8
IND_C_1608X60 [mm] "Chip Resistor, 2-Leads, Body 1.63x0.83mm, IPC High Density"
  rrect50% 0.85x0.95 smd: 1(-0.775,0) 2(0.775,0)
  silkscreen extent -0.9,-0.7 0.9,0.7, body extent -0.8,-0.4 0.8,0.4, height 0.8
JUMPER_1608 [mil]
  round 1 smd: 1(30.51,0)
  round 1 smd paste-99999 mask+4: 2(-30,0)
  Top Layer region: -14.86,-0.09 3.75,-18.7 -38.37,-18.7 -41.57,-18.06 -44.28,-16.25 -46.1,-13.54 -46.73,-10.33 -46.73,-10.33 -46.73,10.33 -46.1,13.54 -44.28,16.25 -41.57,18.06 -38.37,18.7 -38.37,18.7 3.93,18.7
  Top Layer region: 38.88,-18.7 13.56,-18.7 -5,0 13.56,18.7 38.88,18.7 42.08,18.06 44.79,16.25 46.61,13.54 47.24,10.33 47.24,10.33 47.24,-10.33 46.61,-13.54 44.79,-16.25 42.08,-18.06 38.88,-18.7
  silkscreen extent -40,-27 41,27
LED_0603 [mm]
  rrect50% 0.85x0.95 smd: 1(-0.775,0) 2(0.775,0)
  silkscreen extent -1.4,-0.7 0.9,0.7, body extent -0.8,-0.4 0.8,0.4, height 0.7
MODULE_FPGA [mm]
  rrect50% 1.65x1.65 hole 1.1: 1(-1.524,-7.112)
  round 1.65 hole 1.1: 2(-1.524,-4.572) 3(1.016,-7.112) 4(1.016,-4.572) 5(3.556,-7.112) 6(3.556,-4.572) 7(6.096,-7.112) 8(6.096,-4.572) 9(8.636,-7.112) 10(8.636,-4.572) 11(11.176,-7.112) 12(11.176,-4.572) 13(13.716,-7.112) 14(13.716,-4.572) 15(16.256,-7.112) 16(16.256,-4.572) 17(18.796,-7.112) 18(18.796,-4.572) 19(4.826,7.366) 20(7.366,7.366) 21(9.906,7.366) 22(12.446,7.366)
  Keep-Out Layer region: -8.331,-8.255 -8.331,8.509 25.451,8.509 25.451,-8.255
  silkscreen extent -8.33,-9.22 25.45,8.51
MOLEX_47590-0001 [mm]
  rect 0.4x1.35 smd mask+0.07: 1(1.3,2.675) 2(0.65,2.675) 3(0,2.675) 4(-0.65,2.675) 5(-1.3,2.675)
  oval 1x1.9 hole 0.65 slot 1.35 at 90 deg mask+0: SH1(-4.175,0) SH2(4.175,0)
  oval 1.1x1.3 hole 0.7 slot 0.9 at 90 deg mask+0.1: SH3(-2.225,3) SH4(2.225,3)
  rect 2.9x1.9 smd: SH5(0,0)
  Top Layer region: 4.106,0.949 4.138,0.947 4.169,0.943 4.2,0.937 4.23,0.93 4.26,0.921 4.29,0.91 4.319,0.898 4.347,0.885 4.375,0.87 4.402,0.853 4.428,0.835 4.453,0.816 4.476,0.796 4.499,0.774 4.521,0.751 4.541,0.728 4.56,0.703 4.578,0.677 4.595,0.65 4.61,0.622 4.623,0.594 4.635,0.565 4.646,0.535 4.655,0.505 4.662,0.475 4.668,0.444 4.672,0.413 4.674,0.381 4.675,0.35 4.675,-0.35 4.674,-0.381 4.672,-0.413 4.668,-0.444 4.662,-0.475 4.655,-0.505 4.646,-0.535 4.635,-0.565 4.623,-0.594 4.61,-0.622 4.595,-0.65 4.578,-0.677 4.56,-0.703 4.541,-0.728 4.521,-0.751 4.499,-0.774 4.476,-0.796 4.453,-0.816 4.428,-0.835 4.402,-0.853 4.375,-0.87 4.347,-0.885 4.319,-0.898 4.29,-0.91 4.26,-0.921 4.23,-0.93 4.2,-0.937 4.169,-0.943 4.138,-0.947 4.106,-0.949 4.075,-0.95 3.3,-0.95 3.3,0.95 4.075,0.95
  Top Layer region: -3.3,-0.95 -4.075,-0.95 -4.106,-0.949 -4.138,-0.947 -4.169,-0.943 -4.2,-0.937 -4.23,-0.93 -4.26,-0.921 -4.29,-0.91 -4.319,-0.898 -4.347,-0.885 -4.375,-0.87 -4.402,-0.853 -4.428,-0.835 -4.453,-0.816 -4.476,-0.796 -4.499,-0.774 -4.521,-0.751 -4.541,-0.728 -4.56,-0.703 -4.578,-0.677 -4.595,-0.65 -4.61,-0.622 -4.623,-0.594 -4.635,-0.565 -4.646,-0.535 -4.655,-0.505 -4.662,-0.475 -4.668,-0.444 -4.672,-0.413 -4.674,-0.381 -4.675,-0.35 -4.675,0.35 -4.674,0.381 -4.672,0.413 -4.668,0.444 -4.662,0.475 -4.655,0.505 -4.646,0.535 -4.635,0.565 -4.623,0.594 -4.61,0.622 -4.595,0.65 -4.578,0.677 -4.56,0.703 -4.541,0.728 -4.521,0.751 -4.499,0.774 -4.476,0.796 -4.453,0.816 -4.428,0.835 -4.402,0.853 -4.375,0.87 -4.347,0.885 -4.319,0.898 -4.29,0.91 -4.26,0.921 -4.23,0.93 -4.2,0.937 -4.169,0.943 -4.138,0.947 -4.106,0.949 -4.075,0.95 -3.3,0.95
  Bottom Layer region: 4.106,0.949 4.138,0.947 4.169,0.943 4.2,0.937 4.23,0.93 4.26,0.921 4.29,0.91 4.319,0.898 4.347,0.885 4.375,0.87 4.402,0.853 4.428,0.835 4.453,0.816 4.476,0.796 4.499,0.774 4.521,0.751 4.541,0.728 4.56,0.703 4.578,0.677 4.595,0.65 4.61,0.622 4.623,0.594 4.635,0.565 4.646,0.535 4.655,0.505 4.662,0.475 4.668,0.444 4.672,0.413 4.674,0.381 4.675,0.35 4.675,-0.35 4.674,-0.381 4.672,-0.413 4.668,-0.444 4.662,-0.475 4.655,-0.505 4.646,-0.535 4.635,-0.565 4.623,-0.594 4.61,-0.622 4.595,-0.65 4.578,-0.677 4.56,-0.703 4.541,-0.728 4.521,-0.751 4.499,-0.774 4.476,-0.796 4.453,-0.816 4.428,-0.835 4.402,-0.853 4.375,-0.87 4.347,-0.885 4.319,-0.898 4.29,-0.91 4.26,-0.921 4.23,-0.93 4.2,-0.937 4.169,-0.943 4.138,-0.947 4.106,-0.949 4.075,-0.95 3.3,-0.95 3.3,0.95 4.075,0.95
  Bottom Layer region: -3.3,-0.95 -4.075,-0.95 -4.106,-0.949 -4.138,-0.947 -4.169,-0.943 -4.2,-0.937 -4.23,-0.93 -4.26,-0.921 -4.29,-0.91 -4.319,-0.898 -4.347,-0.885 -4.375,-0.87 -4.402,-0.853 -4.428,-0.835 -4.453,-0.816 -4.476,-0.796 -4.499,-0.774 -4.521,-0.751 -4.541,-0.728 -4.56,-0.703 -4.578,-0.677 -4.595,-0.65 -4.61,-0.622 -4.623,-0.594 -4.635,-0.565 -4.646,-0.535 -4.655,-0.505 -4.662,-0.475 -4.668,-0.444 -4.672,-0.413 -4.674,-0.381 -4.675,-0.35 -4.675,0.35 -4.674,0.381 -4.672,0.413 -4.668,0.444 -4.662,0.475 -4.655,0.505 -4.646,0.535 -4.635,0.565 -4.623,0.594 -4.61,0.622 -4.595,0.65 -4.578,0.677 -4.56,0.703 -4.541,0.728 -4.521,0.751 -4.499,0.774 -4.476,0.796 -4.453,0.816 -4.428,0.835 -4.402,0.853 -4.375,0.87 -4.347,0.885 -4.319,0.898 -4.29,0.91 -4.26,0.921 -4.23,0.93 -4.2,0.937 -4.169,0.943 -4.138,0.947 -4.106,0.949 -4.075,0.95 -3.3,0.95
  Keep-Out Layer board cut-out: 3.75,-1.45 -3.75,-1.45 -2.8,-1.45 -2.8,0.125 -2.799,0.147 -2.798,0.169 -2.795,0.191 -2.791,0.213 -2.786,0.235 -2.779,0.256 -2.772,0.277 -2.763,0.298 -2.754,0.318 -2.743,0.338 -2.731,0.356 -2.719,0.375 -2.705,0.392 -2.691,0.409 -2.676,0.426 -2.659,0.441 -2.642,0.455 -2.625,0.469 -2.606,0.481 -2.587,0.493 -2.568,0.504 -2.548,0.513 -2.527,0.522 -2.506,0.529 -2.485,0.536 -2.463,0.541 -2.441,0.545 -2.419,0.548 -2.397,0.549 -2.375,0.55 -2.353,0.549 -2.331,0.548 -2.309,0.545 -2.287,0.541 -2.265,0.536 -2.244,0.529 -2.223,0.522 -2.202,0.513 -2.182,0.504 -2.163,0.493 -2.144,0.481 -2.125,0.469 -2.108,0.455 -2.091,0.441 -2.074,0.426 -2.059,0.409 -2.045,0.392 -2.031,0.375 -2.019,0.356 -2.007,0.337 -1.996,0.318 -1.987,0.298 -1.978,0.277 -1.971,0.256 -1.964,0.235 -1.959,0.213 -1.955,0.191 -1.952,0.169 -1.951,0.147 -1.95,0.125 -1.95,-1.45 1.95,-1.45 1.95,0.125 1.951,0.147 1.952,0.169 1.955,0.191 1.959,0.213 1.964,0.235 1.971,0.256 1.978,0.277 1.987,0.298 1.996,0.318 2.007,0.337 2.019,0.356 2.031,0.375 2.045,0.392 2.059,0.409 2.074,0.426 2.091,0.441 2.108,0.455 2.125,0.469 2.144,0.481 2.163,0.493 2.182,0.504 2.202,0.513 2.223,0.522 2.244,0.529 2.265,0.536 2.287,0.541 2.309,0.545 2.331,0.548 2.353,0.549 2.375,0.55 2.397,0.549 2.419,0.548 2.441,0.545 2.463,0.541 2.485,0.536 2.506,0.529 2.527,0.522 2.548,0.513 2.568,0.504 2.587,0.493 2.606,0.481 2.625,0.469 2.642,0.455 2.659,0.441 2.676,0.426 2.691,0.409 2.705,0.392 2.719,0.375 2.731,0.356 2.743,0.338 2.754,0.318 2.763,0.298 2.772,0.277 2.779,0.256 2.786,0.235 2.791,0.213 2.795,0.191 2.798,0.169 2.799,0.147 2.8,0.125 2.8,-1.45
  silkscreen extent -3.75,1.27 3.75,3.99, body extent -4.33,-2.75 4.33,3.15, height 2.73
NSC5004D-25M [mm] "25 MHz XO (Standard) CMOS Oscillator 3.3V Standby (Power Down) 4-SMD, No Lead"
  rect 0.991x0.991 smd paste+0 mask+0: 1(-0.625,0.825) 2(-0.625,-0.825) 3(0.625,-0.825) 4(0.625,0.825)
  silkscreen extent -1.75,0.81 -1.65,0.91, body extent -1.05,-1.3 1.05,1.3, height 0.89
QFN32_5X5MC_MCH [mil]
  rect 32x10 smd paste+0 mask+0: 1(-96.5,70) 2(-96.5,50) 3(-96.5,30) 4(-96.5,10) 5(-96.5,-10) 6(-96.5,-30) 7(-96.5,-50) 8(-96.5,-70) 17(96.5,-70) 18(96.5,-50) 19(96.5,-30) 20(96.5,-10) 21(96.5,10) 22(96.5,30) 23(96.5,50) 24(96.5,70)
  rect 10x32 smd paste+0 mask+0: 9(-70,-96.5) 10(-50,-96.5) 11(-30,-96.5) 12(-10,-96.5) 13(10,-96.5) 14(30,-96.5) 15(50,-96.5) 16(70,-96.5) 25(70,96.5) 26(50,96.5) 27(30,96.5) 28(10,96.5) 29(-10,96.5) 30(-30,96.5) 31(-50,96.5) 32(-70,96.5)
  rect 134x134 smd paste-66.5 mask-66.5: 33(0,0)
  silkscreen extent -145,-132 132,132, body extent -101,-101 101,101, height 65
RES_C_1608X60 [mm] "Chip Resistor, 2-Leads, Body 1.63x0.83mm, IPC High Density"
  rrect50% 0.85x0.95 smd: 1(-0.775,0) 2(0.775,0)
  silkscreen extent -0.9,-0.7 0.9,0.7, body extent -0.87,-0.48 0.87,0.48, height 0.6
SOIC8_150MIL_N_ISI [mil]
  rect 57.5x22 smd paste+0 mask+0: 1(-107.25,75) 2(-107.25,25) 3(-107.25,-25) 4(-107.25,-75) 5(107.25,-75) 6(107.25,-25) 7(107.25,25) 8(107.25,75)
  silkscreen extent -168,-104 84,104, body extent -122,-99 122,99, height 69
SOIC127P599X175-8N [mm] "SN65HVD230DR"
  rrect25% 1.97x0.6 smd: 1(-2.47,1.905) 2(-2.47,0.635) 3(-2.47,-0.635) 4(-2.47,-1.905) 5(2.47,-1.905) 6(2.47,-0.635) 7(2.47,0.635) 8(2.47,1.905)
  silkscreen extent -4.14,-2.52 1.95,2.52, body extent -3,-2.45 3,2.45, height 1.75
SOT323-3L_STM [mil]
  rect 18x40 smd paste+0 mask+0: 1(-25.59,-41) 2(25.59,-41) 3(0,41)
  silkscreen extent -49,-87 49,32, body extent -44,-47 44,47, height 43
SOT-223_STM [mil]
  rect 36x63 smd paste+0: 1(-90.55,-126) 2(0,-126) 3(90.55,-126)
  rect 125.98x62.99 smd paste+0: 4(1,126)
  Top Layer region: 63,94.5 63,157.5 -63,157.5 -63,94.5
  silkscreen extent -137,-210 137,78, body extent -132,-144 132,144, height 71
SRP7050TA-220M [mm]
  rect 2.95x3.5 smd: 1(-2.725,0) 2(2.725,0)
  silkscreen extent -4.4,-3.3 4.4,3.3, body extent -3.65,-3.3 3.65,3.3, height 4.6
SW2-SMD [mm]
  rect 1.2x0.8 smd: 1(-3.5,0) 2(3.5,0)
  silkscreen extent -2.82,-1.85 2.82,1.85, body extent -3.05,-1.85 3.05,1.85, height 2.5
TESTPOINT [mm]
  round 1.5 smd: 1(0,0)
  silkscreen extent -1,-1 1,1
TPL5010DDCR [mm]
  rrect25% 1.45x0.59 smd: 1(-1.155,0.95) 2(-1.155,0) 3(-1.155,-0.95) 4(1.155,-0.95) 5(1.155,0) 6(1.155,0.95)
  silkscreen extent -2.5,-1.57 0.8,1.57, body extent -1.4,-1.45 1.4,1.45, height 1.1
TSSOP8_SOT505-1_NXP [mil]
  rect 53.5x20 smd paste+0 mask+0: 1(-87.75,38.39) 2(-87.75,12.8) 3(-87.75,-12.8) 4(-87.75,-38.39) 5(87.75,-38.39) 6(87.75,-12.8) 7(87.75,12.8) 8(87.75,38.39)
  silkscreen extent -145,-66 66,66, body extent -101,-61 101,61, height 43
VQFN-HR-10 [mm]
  rect 0.65x0.3 smd: 1(-0.938,0.692) 4(-0.941,-0.708) 7(0.909,-0.708) 10(0.909,0.692)
  rect 0.25x0.65 smd: 1(-0.738,0.867) 4(-0.741,-0.883) 7(0.709,-0.883) 10(0.709,0.867)
  rect 0.65x0.25 smd: 2(-0.938,0.216) 3(-0.941,-0.233) 8(0.909,-0.233) 9(0.909,0.216)
  rect 0.3x2.4 smd: 5(-0.265,-0.008) 6(0.235,-0.007)
  silkscreen extent -1.3,-1.25 1.28,1.23, body extent -1.03,-1.01 0.97,0.99, height 1
XTAL_ECS-250-12-33Q-JES-TR [mm]
  rect 1.3x1.1 smd: 1(-1.15,-0.9) 2(1.15,-0.9) 3(1.15,0.9) 4(-1.15,0.9)
  silkscreen extent -1.24,-2.08 0.3,1.25, body extent -1.6,-1.25 1.6,1.25, height 0.8
XTAL_MU00525_NDK [mil]
  rect 42x49 smd: 1(-56,0) 2(56,0)
  silkscreen extent -30,-36 30,36, body extent -65,-31 65,31, height 35